# EAGLE board All_Plate_Release (EAGLE 9.3.0)
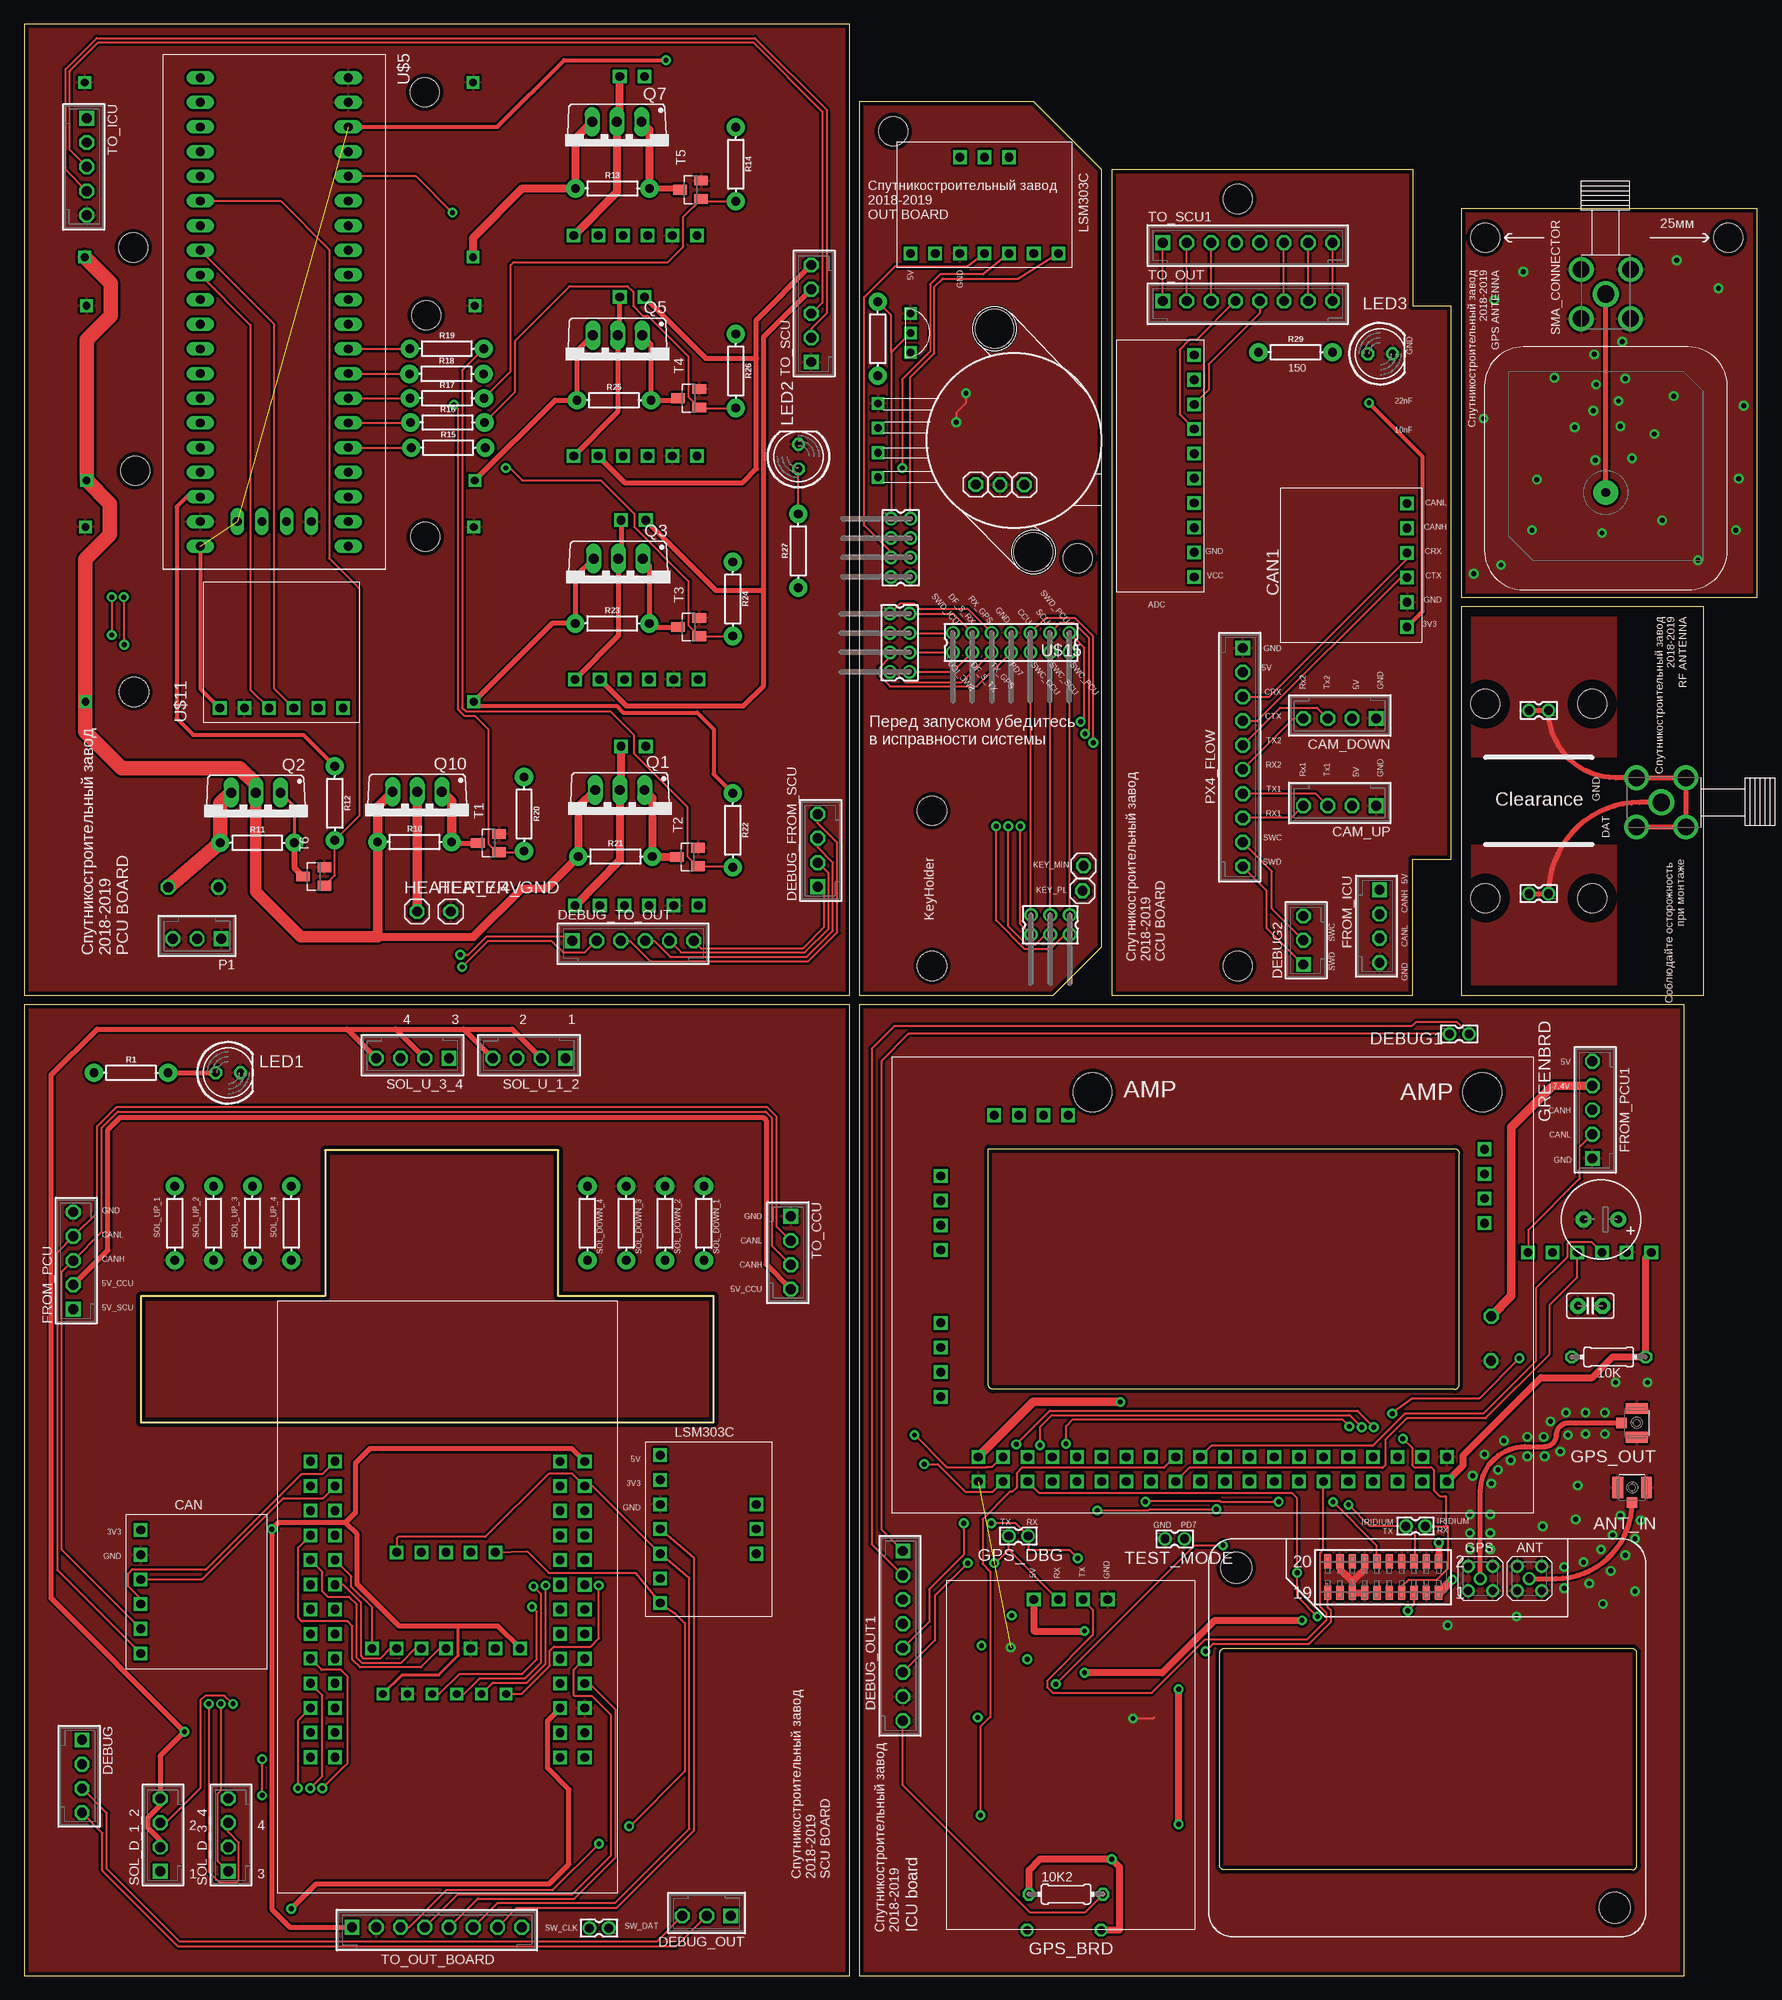
[diagram p0: board, top side]
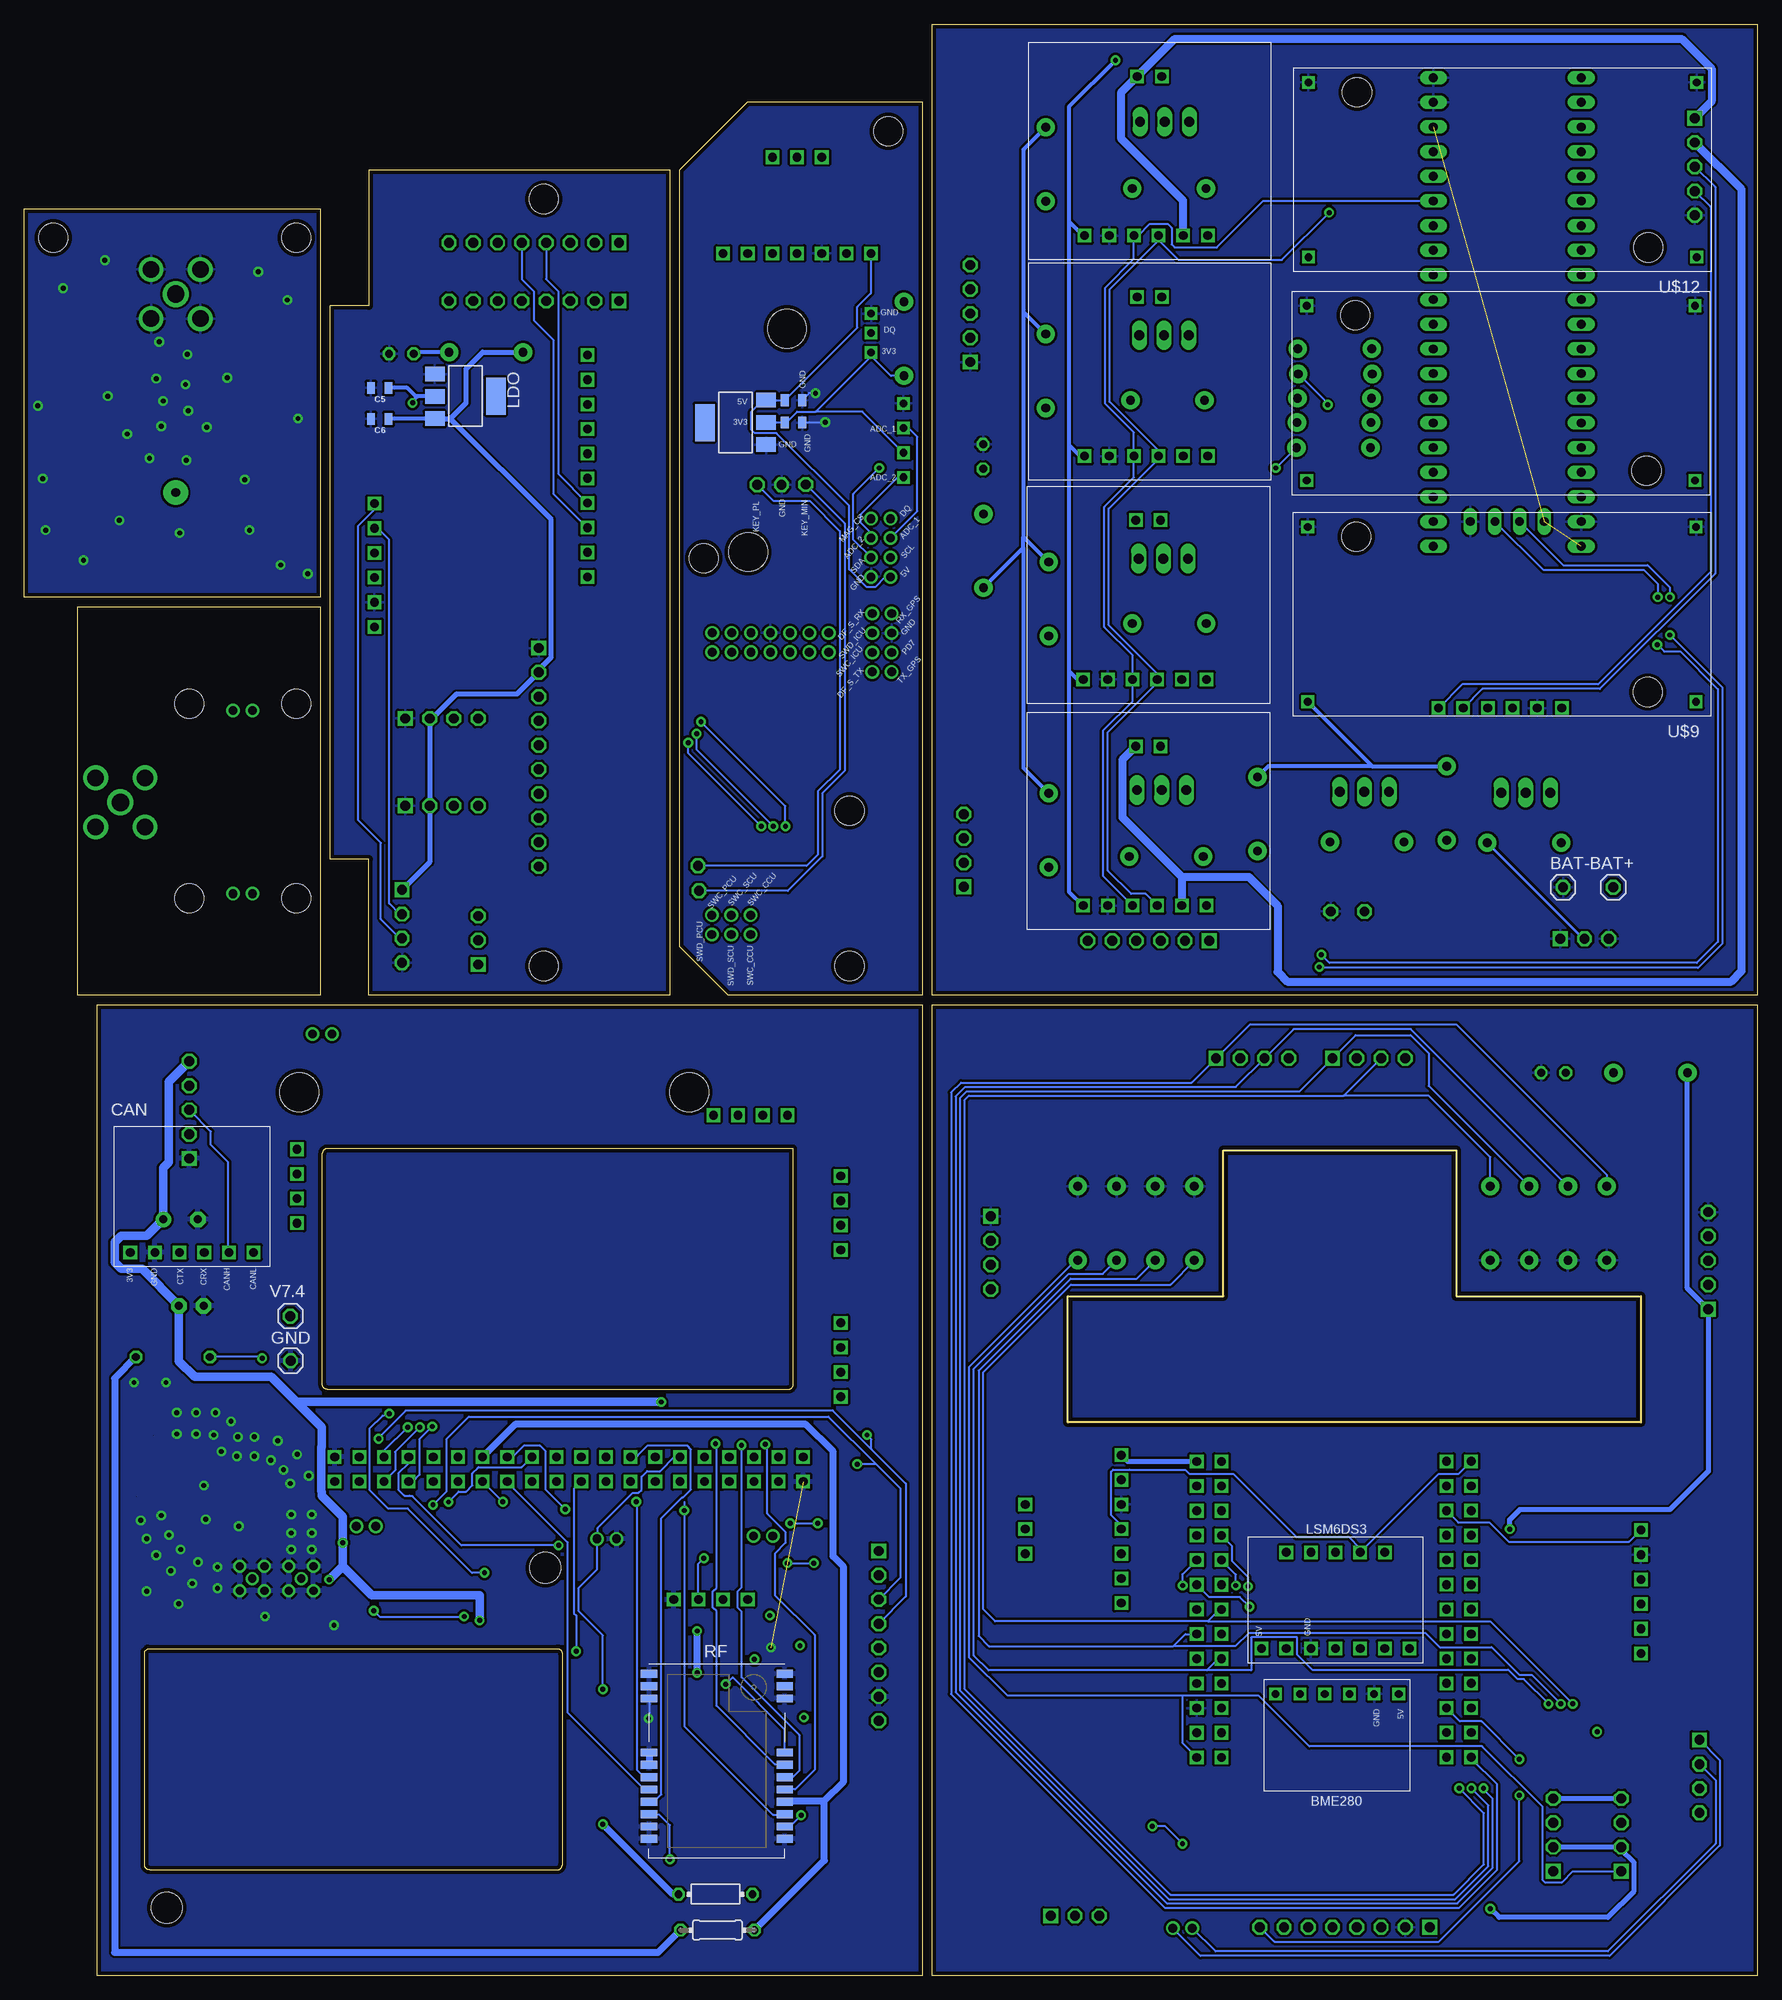
[diagram p1: board, bottom side, seen from below]

Size 178.5 x 201 mm. Coordinates in mm from the lower left corner, seen from the top.
Outline: 0,0 85,0 85,100 0,100 0,0
Outline: 55,85 31,85 31,70 12,70 12,57 71,57 71,70 55,70 55,85
Outline: 86,0 171,0 171,100 86,100 86,0
Outline: 99.3,85.2 147.3,85.2 arc-90 147.8,84.7 147.8,60.9 arc-90 147.3,60.4 99.8,60.4 arc-90 99.3,60.9 99.3,85.2
Outline: 123.1,33.2 123.1,11.4 arc90 123.6,10.9 165.6,10.9 arc90 166.1,11.4 166.1,33.4 165.8,33.7 123.6,33.7 arc90 123.1,33.2
Outline: 0,101 85,101 85,201 0,201 0,101
Outline: 86,193 86,101 106,101 111,106 111,186 104,193 86,193
Outline: 147,115 147,172 143,172 143,186 112,186 112,101 143,101 143,115 147,115
Outline: 148,141 148,101 173,101 173,141 148,141
Outline: 178.5,142 178.5,182 148,182 148,142 178.5,142
Copper layers (1*16): Top 0.035mm / dielectric 1mm / Bottom 0.035mm
Design rules "rezonit": minimum track width 0.2mm, minimum drill 0.5mm, track to track 0.25mm, track to pad 0.25mm, pad to pad 0.25mm, via to via 0.25mm, smd to smd 0.2mm, copper to edge 0.4mm, drill to drill 0.4mm, minimum pad ring 0.25mm, minimum via ring 0.25mm, stop-mask expansion 4mil, vias tented up to drill 0.6mm, thermal gap 10mil
Net classes: 0 default: clearance 0.065 mm; 2 rf: width 0.5 mm, clearance 0.065 mm
Holes 3.2 mm at 124.84,42 163.84,7
Holes 4 mm at 110.02,91.01 150.18,91.01
Holes 3 mm at 89.5,190 108.5,146 93.5,104 93.5,120 125,104 125,183 150.5,131 161.5,131 150.5,111 161.5,111 175.5,179 150.5,179

## Footprints (pad centres in the part's own frame; a part is rotated, then mirrored left to right if it is on the bottom)
0204/7 = drill 0.813 octagon: 1 -3.81,0; 2 3.81,0
MMCX-P-P-X-ST-TH1 = drill 0.84 pad 1.3: 1 0,0; 2 -1.27,1.27; 3 -1.27,-1.27; 4 1.27,1.27; 5 1.27,-1.27
HRS_U.FL-R-SMT(01) = smd 1.1 x 2.25: 1 -1.475,0; 2 1.475,0 | smd 1.05 x 1.1: 3 0,-1.55
1X01 = drill 1.016 octagon: 1 0,0
E3,5-8 = drill 0.813 pad 1.6: + -1.778,0 | drill 0.813 pad 1.6 octagon: - 1.778,0
C2.5-2 = drill 0.813 pad 1.6 octagon: 1 -1.27,0; 2 1.27,0
0805 = smd 0.8 x 1.2: 1 -0.9,0; 2 0.9,0
B4B-EH-A = drill 1.016 square: 1 -3.75,0 | drill 1.016 octagon: 2 -1.25,0; 3 1.25,0; 4 3.75,0
CAN = drill 0.9 square: 3V3 -5.75,6.35; CANH -5.75,-3.81; CANL -5.75,-6.35; CRX -5.75,-1.27; CTX -5.75,1.27; GND -5.75,3.81
332-02 = drill 0.9 pad 1.27: 1 0,-1; 2 0,1
B3B-EH-A = drill 1.016 square: 1 -2.5,0 | drill 1.016 octagon: 2 0,0; 3 2.5,0
B8B-EH-A = drill 1.016 square: 1 -8.75,0 | drill 1.016 octagon: 2 -6.25,0; 3 -3.75,0; 4 -1.25,0; 5 1.25,0; 6 3.75,0; 7 6.25,0; 8 8.75,0
B6B-EH-A = drill 1.016 square: 1 -6.25,0 | drill 1.016 octagon: 2 -3.75,0; 3 -1.25,0; 4 1.25,0; 5 3.75,0; 6 6.25,0
B5B-EH-A = drill 1.016 square: 1 -5,0 | drill 1.016 octagon: 2 -2.5,0; 3 0,0; 4 2.5,0; 5 5,0
GPS = drill 0.9 square: GND -16,3.81; RX -16,-1.27; TX -16,1.27; UCC -16,-3.81
ICU = drill 0.9 square: 3V3_0 20.23,24.13; 3V3_1 8.96,-28; 5V_0 17.69,-24.13; 5V_1 -14,28; 5V_2 -17.5,-19.96; GND -8.92,28; GND_0 20.23,-24.13; GND_1 17.69,24.13; GND_2 -17.5,-22.5; GND_3 11.5,-28; PA1 20.23,21.59; PA2 6.42,-28; PA3 3.88,-28; PA4 -11.24,-28; PA5 -8.7,-28; PA6 -6.16,-28; PA7 -3.62,-28; PA8 20.23,3.81; PB0 20.23,-13.97; PB1 17.69,-13.97; PB2 20.23,-16.51; PB3 17.69,-16.51; PB4 20.23,-19.05; PB5 17.69,-19.05; PB6 20.23,-21.59; PB7 17.69,-21.59; PB12 17.69,16.51; PB13 20.23,16.51; PB14 17.69,19.05; PB15 20.23,19.05; PC1 -17.5,-17.42; PC2 -17.5,-14.88; PC4 17.69,21.59; PC5 20.23,13.97; PC7 17.69,1.27; PC8 20.23,1.27; PC9 17.69,3.81; PD0 20.23,-3.81; PD1 17.69,-1.27; PD4 20.23,-8.89; PD5 17.69,-8.89; PD7 17.69,-11.43; PD8 17.69,11.43; PD9 20.23,11.43; PD10 17.69,13.97; PD11 20.23,-11.43; PD13 17.69,-6.35; PD14 20.23,-6.35; PD15 17.69,-3.81; PE7 20.23,-1.27; PE12 17.69,6.35; PE13 20.23,6.35; PE14 17.69,8.89; PE15 20.23,8.89; SWC -6.38,28; SWD -11.46,28
SOT223 = smd 1.499 x 2.007: 1 -2.261,-3.15; 2 0.025,-3.15; 3 2.311,-3.15 | smd 3.81 x 2.007: 4 0,3.15
TE_221790-1 = drill 1.778: 1 0,0 | drill 1.702: 2 -2.54,2.54; 3 2.54,2.54; 4 -2.54,-2.54; 5 2.54,-2.54
LED5MM = drill 0.813 octagon: A -1.27,0; K 1.27,0
B10B-EH-A = drill 1.016 square: 1 -11.25,0 | drill 1.016 octagon: 2 -8.75,0; 3 -6.25,0; 4 -3.75,0; 5 -1.25,0; 6 1.25,0; 7 3.75,0; 8 6.25,0; 9 8.75,0; 10 11.25,0
TO220BV = drill 1.016 long: D 0,-2.54; G -2.54,-2.54; S 2.54,-2.54
AXIAL-0.3 = drill 0.9 pad 1.88: P$1 -3.81,0; P$2 3.81,0
E22-400M22S = smd 0.813 x 1.676: P$1 -9,-6.97; P$2 -7.73,-6.97; P$3 -6.46,-6.97; P$4 -0.89,-6.97; P$5 0.38,-6.97; P$6 1.65,-6.97; P$7 2.92,-6.97; P$8 4.19,-6.97; P$9 5.46,-6.97; P$10 6.73,-6.97; P$11 8,-6.97; P$12 8,7; P$13 6.73,7; P$14 5.46,7; P$15 4.19,7; P$16 2.92,7; P$17 1.65,7; P$18 0.38,7; P$19 -0.89,7; P$20 -6.46,7; P$21 -7.73,7; P$22 -9,7
SOT23 = smd 1 x 1.4: 1 -0.95,-1.1; 2 0.95,-1.1; 3 0,1.1
SCU = drill 0.9 square: 3.3V 11.59,-11.43; 5VUSB 11.59,11.43; +3.3V -11.59,8.9; GND_1 11.59,13.97; GND_2 14.13,-11.43; GND_3 -14.13,8.9; GNDA 11.59,-13.97; NRST -11.59,-16.5; PA0 14.13,-13.97; PA1 14.13,-8.89; PA2 11.59,-8.89; PA3 14.13,-6.35; PA4 11.59,-3.81; PA5 -14.13,-6.34; PA6 -14.13,-1.26; PA7 -14.13,-11.42; PA8 -14.13,13.98; PA9 -14.13,11.44; PA10 -11.59,6.36; PA11 -11.59,13.98; PA12 -11.59,11.44; PB0 -11.59,-11.42; PB1 -14.13,-16.5; PB5 -14.13,1.28; PB6 -11.59,-1.26; PB7 -11.59,-3.8; PB8 -14.13,-3.8; PB9 -11.59,-6.34; PB10 14.13,-1.27; PB11 11.59,1.27; PB12 11.59,3.81; PB13 14.13,1.27; PB14 14.13,3.81; PB15 11.59,6.35; PC0 -11.59,-8.88; PC1 -14.13,-8.88; PC2 14.13,-16.51; PC3 11.59,-6.35; PC4 14.13,-3.81; PC5 11.59,-1.27; PC6 14.13,6.35; PC7 11.59,8.89; PC8 14.13,8.89; PC9 14.13,11.43; PC10 -14.13,6.36; PC11 -11.59,3.82; PC12 -14.13,3.82; PC13 -14.13,-13.96; PD2 -11.59,1.28; VBAT -11.59,-13.96; VDDA 11.59,-16.51; VIN 14.13,13.97
BME = drill 0.8 square: CSB 4.25,3.81; GND 4.25,-3.81; SCL 4.25,-1.27; SDA 4.25,1.27; SDO 4.25,6.35; VCC 4.25,-6.35
LSM6DS3 = drill 0.9 square: 3V3 -5,5.08; CS -5,-5.08; GND -5,2.54; INT1 4.9,0; INT2 4.9,2.54; OCS 4.9,5.08; SAD -5,-7.62; SCL -5,0; SCX 4.9,-2.54; SDA -5,-2.54; SDX 4.9,-5.08; VIN -5,7.62
LSM303C = drill 0.9 square: 3V3 -5,5.08; 5V -5,7.62; CSA -5,-5.08; CSM -5,-7.62; DRYM 4.9,0; GND -5,2.54; INTA 4.9,2.54; INTM 4.9,-2.54; SCL -5,0; SDA -5,-2.54
BLUEPIL = drill 0.9 long: 3V3_0 -19.05,7.62; 3V3_1 24.13,-7.62; 3V3_2 21.59,-3.81; 5V 19.05,-7.62; A0 13.97,7.62; A1 11.43,7.62; A2 8.89,7.62; A3 6.35,7.62; A4 3.81,7.62; A5 1.27,7.62; A6 -1.27,7.62; A7 -3.81,7.62; A8 -13.97,-7.62; A9 -11.43,-7.62; A10 -8.89,-7.62; A11 -6.35,-7.62; A12 -3.81,-7.62; A15 -1.27,-7.62; B0 -6.35,7.62; B1 -8.89,7.62; B3 1.27,-7.62; B4 3.81,-7.62; B5 6.35,-7.62; B6 8.89,-7.62; B7 11.43,-7.62; B8 13.97,-7.62; B9 16.51,-7.62; B10 -11.43,7.62; B11 -13.97,7.62; B12 -24.13,-7.62; B13 -21.59,-7.62; B14 -19.05,-7.62; B15 -16.51,-7.62; C13 21.59,7.62; C14 19.05,7.62; C15 16.51,7.62; GND0 -24.13,7.62; GND1 -21.59,7.62; GND2 21.59,-7.62; GND3 21.59,3.81; RESET -16.51,7.62; SWCLK 21.59,1.27; SWDIO 21.59,-1.27; VB 24.13,7.62
INA = drill 0.9 square: GND -4.15,-8.7; SCL -1.61,-8.7; SDA 0.93,-8.7; VCC -6.69,-8.7; VIN+_0 6.01,-8.7; VIN+_1 1.27,7.7; VIN-_0 3.47,-8.7; VIN-_1 -1.27,7.7
DCDC = drill 0.8 square: IN+ -20,9; IN- -20,-9; OUT+ 20,9; OUT- 20,-9 | hole 3: -15,8; 15,-8
MPX = drill 0.8 square: GND 14,-3.81; V1 14,-1.27; V2 14,3.81; VCC 14,1.27 | hole 4: -2,11.5; 2,-11.5
TEMP = drill 0.8 square: DQ -0.5,0; GND -0.5,-2; VDD -0.5,2
ADS = drill 0.9 square: A0 -3.5,-3.81; A1 -3.5,-6.35; A2 -3.5,-8.89; A3 -3.5,-11.43; ADDR -3.5,1.27; ALERT -3.5,-1.27; G -3.5,8.89; SCL -3.5,6.35; SDA -3.5,3.81; V -3.5,11.43
BY-IRIDIUM-254 = drill 0.9 pad 2.54: P$1 0,0
SAMTEC-CLP-110-02-X-D = smd 0.74 x 1.47: 1 -5.715,1.613; 2 -5.715,-1.613; 3 -4.445,1.613; 4 -4.445,-1.613; 5 -3.175,1.613; 6 -3.175,-1.613; 7 -1.905,1.613; 8 -1.905,-1.613; 9 -0.635,1.613; 10 -0.635,-1.613; 11 0.635,1.613; 12 0.635,-1.613; 13 1.905,1.613; 14 1.905,-1.613; 15 3.175,1.613; 16 3.175,-1.613; 17 4.445,1.613; 18 4.445,-1.613; 19 5.715,1.613; 20 5.715,-1.613
332-14 = drill 0.9 pad 1.27: 1 -6,-1; 2 -6,1; 3 -4,-1; 4 -4,1; 5 -2,-1; 6 -2,1; 7 0,-1; 8 0,1; 9 2,-1; 10 2,1; 11 4,-1; 12 4,1; 13 6,-1; 14 6,1
332-08 = drill 0.9 pad 1.27: 1 -3,-1; 2 -3,1; 3 -1,-1; 4 -1,1; 5 1,-1; 6 1,1; 7 3,-1; 8 3,1
332-06 = drill 0.9 pad 1.27: 1 -2,-1; 2 -2,1; 3 0,-1; 4 0,1; 5 2,-1; 6 2,1

## Placement (x,y rotation side)
10K  10K  [0204/7]  163.19,63.73 180 top
10K1  10K  [0204/7]  107.1,4.7 0 bottom
10K2  10K  [0204/7]  107.3,8.4 0 top
ANT1  MMCX-P-P-X-ST-TH1  [MMCX-P-P-X-ST-TH1]  155.03,40.91 0 top
ANT_IN  U.FL-R-SMT(01)  [HRS_U.FL-R-SMT(01)]  165.6,50.28 0 top
BAT+  [1X01]  14.83,112.12 0 bottom
BAT-  [1X01]  20.01,112.12 0 bottom
C1  [E3,5-8]  162.4,77.9 180 top
C2  [C2.5-2]  161.3,69 0 top
C3  22uF  [0805]  99.27,159.97 0 bottom
C4  10uF  [0805]  99.28,162.27 0 bottom
C5  22uF  [0805]  141.89,163.54 180 bottom
C6  10uF  [0805]  141.89,160.35 180 bottom
CAM_DOWN  B4B-EH-A  [B4B-EH-A]  135.5,129.5 180 top
CAM_UP  B4B-EH-A  [B4B-EH-A]  135.5,120.5 180 top
CAN  CAN  [CAN]  161.23,80.25 90 bottom
CAN1  CAN  [CAN]  136.68,145.28 180 top
DEBUG  B4B-EH-A  [B4B-EH-A]  5.95,20.54 270 top
DEBUG1  332-02  [332-02]  147.8,97 270 top
DEBUG2  B3B-EH-A  [B3B-EH-A]  131.75,106.65 90 top
DEBUG_FROM_SCU  B4B-EH-A  [B4B-EH-A]  81.73,115.9 90 top
DEBUG_OUT  B3B-EH-A  [B3B-EH-A]  70.28,6.16 180 top
DEBUG_OUT1  B8B-EH-A  [B8B-EH-A]  90.5,35 270 top
DEBUG_TO_OUT  B6B-EH-A  [B6B-EH-A]  62.7,106.6 0 top
FROM_ICU  B4B-EH-A  [B4B-EH-A]  139.59,108.1 270 top
FROM_PCU  B5B-EH-A  [B5B-EH-A]  5.05,73.66 90 top
FROM_PCU1  B5B-EH-A  [B5B-EH-A]  161.52,89.18 90 top
GND  [1X01]  151.07,63.34 0 bottom
GPS1  MMCX-P-P-X-ST-TH1  [MMCX-P-P-X-ST-TH1]  149.98,40.91 0 top
GPS_BRD  GPS  [GPS]  107.79,22.75 270 top
GPS_DBG  332-02  [332-02]  102.4,45.3 270 top
GPS_OUT  U.FL-R-SMT(01)  [HRS_U.FL-R-SMT(01)]  166.08,56.94 270 top
GREENBRD  ICU  [ICU]  122.4,71.13 270 top
HEATER_7.4V  [1X01]  40.46,109.62 0 top
HEATER_GND  [1X01]  43.93,109.62 0 top
IC1  REG1117  [SOT223]  105.25,159.97 90 bottom
IRIDIUM  332-02  [332-02]  143.3,46.3 90 top
J1  221790-1  [TE_221790-1]  168.6,120.85 0 top
JP1  [1X01]  109,111.74 270 top
JP2  [1X01]  109.1,114.32 270 top
JP6  [1X01]  98,153.6 270 top
JP7  [1X01]  100.5,153.58 270 top
JP8  [1X01]  103,153.56 270 top
LDO  REG1117  [SOT223]  133.07,162.7 270 bottom
LED1  [LED5MM]  21,93 0 top
LED2  [LED5MM]  79.74,156.47 90 top
LED3  [LED5MM]  139.66,167.07 0 top
P1  B3B-EH-A  [B3B-EH-A]  17.8,106.8 180 top
PX4_FLOW  B10B-EH-A  [B10B-EH-A]  125.5,125.5 270 top
Q1  IRF9530  [TO220BV]  61.35,119.59 180 top
Q2  IRF9530  [TO220BV]  23.85,119.32 180 top
Q3  IRF9530  [TO220BV]  61.18,143.42 180 top
Q5  IRF9530  [TO220BV]  61.11,166.42 180 top
Q7  IRF9530  [TO220BV]  61.04,188.42 180 top
Q10  IRF9530  [TO220BV]  40.47,119.42 180 top
R1  150  [AXIAL-0.3]  11,93 0 top
R2  150  [AXIAL-0.3]  27.5,77.5 90 top
R3  150  [AXIAL-0.3]  23.5,77.5 90 top
R4  150  [AXIAL-0.3]  19.5,77.5 270 top
R5  150  [AXIAL-0.3]  15.5,77.5 90 top
R6  150  [AXIAL-0.3]  58,77.5 270 top
R7  150  [AXIAL-0.3]  62,77.5 90 top
R8  150  [AXIAL-0.3]  66,77.5 90 top
R9  150  [AXIAL-0.3]  70,77.5 270 top
R10  10k  [AXIAL-0.3]  40.2,116.78 0 top
R11  10k  [AXIAL-0.3]  24,116.69 0 top
R12  10k  [AXIAL-0.3]  31.99,120.76 270 top
R13  10k  [AXIAL-0.3]  60.58,184.09 0 top
R14  10k  [AXIAL-0.3]  73.29,186.58 270 top
R15  10  [AXIAL-0.3]  43.66,157.39 0 top
R16  10  [AXIAL-0.3]  43.6,159.99 0 top
R17  10  [AXIAL-0.3]  43.54,162.49 0 top
R18  10  [AXIAL-0.3]  43.48,164.99 0 top
R19  10  [AXIAL-0.3]  43.52,167.59 0 top
R20  10k  [AXIAL-0.3]  51.48,119.66 270 top
R21  10k  [AXIAL-0.3]  60.88,115.28 0 top
R22  10k  [AXIAL-0.3]  72.98,117.98 270 top
R23  10k  [AXIAL-0.3]  60.56,139.28 0 top
R24  10k  [AXIAL-0.3]  72.98,141.8 270 top
R25  10k  [AXIAL-0.3]  60.74,162.28 0 top
R26  10k  [AXIAL-0.3]  73.29,165.28 270 top
R27  150  [AXIAL-0.3]  79.71,146.76 90 top
R28  4k7  [AXIAL-0.3]  87.9,168.6 90 top
R29  150  [AXIAL-0.3]  130.93,167.22 0 top
RF  E22-400M22S  [E22-400M22S]  107.18,22.1 270 bottom
SMA_CONNECTOR  221790-1  [TE_221790-1]  162.9,173.21 90 top
SOL_D_1_2  B4B-EH-A  [B4B-EH-A]  14,14.5 90 top
SOL_D_3_4  B4B-EH-A  [B4B-EH-A]  21,14.5 90 top
SOL_U_1_2  B4B-EH-A  [B4B-EH-A]  52,94.5 180 top
SOL_U_3_4  B4B-EH-A  [B4B-EH-A]  40,94.5 180 top
T1  2N7002E  [SOT23]  47.81,116.66 90 top
T2  2N7002E  [SOT23]  68.31,115.23 90 top
T3  2N7002E  [SOT23]  68.42,138.91 90 top
T4  2N7002E  [SOT23]  68.42,162.48 90 top
T5  2N7002E  [SOT23]  68.62,183.95 90 top
T6  2N7002E  [SOT23]  29.82,113.22 90 top
TEST_MODE  332-02  [332-02]  118.5,45 270 top
TO_CCU  B4B-EH-A  [B4B-EH-A]  78.95,74.47 270 top
TO_ICU  B5B-EH-A  [B5B-EH-A]  6.43,186.32 270 top
TO_OUT  B8B-EH-A  [B8B-EH-A]  126,172.5 0 top
TO_OUT_BOARD  B8B-EH-A  [B8B-EH-A]  42.5,5 0 top
TO_SCU  B5B-EH-A  [B5B-EH-A]  81.07,171.21 90 top
TO_SCU1  B8B-EH-A  [B8B-EH-A]  126,178.5 0 top
U$1  SCU  [SCU]  43.6,39 0 top
U$2  BME  [BME]  43.28,24.77 90 bottom
U$3  LSM6DS3  [LSM6DS3]  43.44,38.71 90 bottom
U$4  LSM303C  [LSM303C]  70.5,46 0 top
U$5  BLUEPILLTHEONLYONE  [BLUEPIL]  25.75,171.37 270 top
U$6  INA  [INA]  62.6,187.93 0 bottom
U$7  CAN  [CAN]  17.74,39.55 0 top
U$8  INA  [INA]  62.74,118.93 0 bottom
U$9  DCDC  [DCDC]  26.3,140.22 180 bottom
U$10  DCDC  [DCDC]  26.41,163.01 180 bottom
U$11  CAN  [CAN]  26.48,136.32 90 top
U$12  DCDC  [DCDC]  26.23,186.01 180 bottom
U$13  INA  [INA]  62.6,165.22 0 bottom
U$14  INA  [INA]  62.74,142.22 0 bottom
U$15  MPX  [MPX]  101.94,158.14 180 top
U$16  TEMP  [TEMP]  90.78,169.2 180 top
U$17  LSM303C  [LSM303C]  98.9,182.4 90 top
U$18  ADS  [ADS]  117,155.5 180 top
U$19  BY-IRIDIUM-254  [BY-IRIDIUM-254]  162.9,152.76 180 top
USER_PORT1  SAMTEC-CLP-110-02-X-DJ  [SAMTEC-CLP-110-02-X-D]  139.96,41.05 180 top
V7.4  [1X01]  151.09,67.94 0 bottom
X1  332-02  [332-02]  59.2,4.9 90 top
X2  332-14  [332-14]  101.64,137.32 0 top
X3  332-08  [332-08]  90.28,147.08 270 top
X4  332-08  [332-08]  90.16,137.3 270 top
X5  332-06  [332-06]  105.68,108.24 0 top
X6  332-02  [332-02]  155.99,111.45 90 top
X7  332-02  [332-02]  155.99,130.33 90 top

## Library data of the parts
10K 10K1 10K2 = rcl; SPICEPREFIX: R
ANT1 GPS1 = MMCX-P-P-X-ST-TH1; DESCRIPTION: Conn MMCX PL 0Hz to 6GHz 50Ohm Solder ST Thru-Hole Gold Over Nickel; DIGI-KEY_PART_NUMBER: SAM10618-ND; DIGI-KEY_PURCHASE_URL: https://www.digikey.ru/product-detail/en/samtec-inc/MMCX-P-P-H-ST-TH1/SAM10618-ND/6561612?utm_source=snapeda&utm_medium=aggregator&utm_campaign=symbol; MF: Samtec Inc.; MP: MMCX-P-P-H-ST-TH1; PACKAGE: None
ANT_IN GPS_OUT = U.FL-R-SMT_01_; DESCRIPTION: U.FL Series 6 Ghz 50 Ohm Ultra-small SMT Coaxial Cable Receptacle; DIGI-KEY_PART_NUMBER: H9161-ND; DIGI-KEY_PURCHASE_URL: https://www.digikey.ru/product-detail/en/hirose-electric-co-ltd/U.FL-R-SMT_01_/H9161-ND/513010?utm_source=snapeda&utm_medium=aggregator&utm_campaign=symbol; MF: Hirose; MP: U.FL-R-SMT_01_; PACKAGE: None
BAT+ BAT- GND HEATER_7.4V HEATER_GND JP1 JP2 JP6-JP8 V7.4 = pinhead
C1 = rcl; SPICEPREFIX: C
C2 = capacitor-wima
C3 C5 = SparkFun-Capacitors; PROD_ID: CAP-08402
C4 C6 = SparkFun-Capacitors; PROD_ID: CAP-14260
CAM_DOWN CAM_UP DEBUG DEBUG2 DEBUG_FROM_SCU DEBUG_OUT DEBUG_OUT1 DEBUG_TO_OUT FROM_ICU FROM_PCU FROM_PCU1 P1 PX4_FLOW SOL_D_1_2 SOL_D_3_4 SOL_U_1_2 SOL_U_3_4 TO_CCU TO_ICU TO_OUT TO_OUT_BOARD TO_SCU TO_SCU1 = con-jst-eh
CAN CAN1 GPS_BRD GREENBRD U$1-U$18 = bluepill
DEBUG1 GPS_DBG IRIDIUM TEST_MODE X1-X7 = con-garry
IC1 LDO = burr-brown; MPN: REG1117; OC_FARNELL: 1097566; OC_NEWARK: 14P6981
J1 SMA_CONNECTOR = 221790-1; AVAILABILITY: Unavailable; COMMENT: 221790-1; DESCRIPTION: JACK,RIGHT ANGLE,PCB,SMA; EU_ROHS_COMPLIANCE: Compliant with Exemptions; MF: TE Connectivity; MP: 221790-1; NUMBER_OF_POSITIONS: 1; PACKAGE: None; PRICE: None; TE_PURCHASE_URL: https://www.te.com/usa-en/product-221790-1.html?te_bu=Cor&te_type=disp&te_campaign=seda_glo_cor-seda-global-disp-prtnr-fy19-seda-model-bom-cta_sma-317_1&elqCampaignId=32493
LED1-LED3 = led
Q1-Q3 Q5 Q7 Q10 = transistor-power
R1-R29 = SparkFun-Resistors
RF = ebyte-radio
T1-T6 = nxp_60
U$19 = iridium-antenna
USER_PORT1 = SAMTEC-CLP-110-02-X-D; DESCRIPTION: .050 Tiger Claw™ Rugged Reliable Dual Wipe Socket Strip; DIGI-KEY_PART_NUMBER: CLP-110-02-L-D-K-ND; DIGI-KEY_PURCHASE_URL: https://www.digikey.ru/product-detail/en/samtec-inc/CLP-110-02-L-D-K/CLP-110-02-L-D-K-ND/6693709?utm_source=snapeda&utm_medium=aggregator&utm_campaign=symbol; MF: Samtec Inc.; MP: CLP-110-02-L-D-K; PACKAGE: None

## Nets
3.3V: 10K1.1 10K2.1 10K.1 CAN.3V3 GREENBRD.3V3_0 RF.P$9
3V1: U$5.3V3_0 U$5.3V3_1 U$5.3V3_2 U$6.VCC U$8.VCC U$11.3V3 U$13.VCC U$14.VCC
3V2: C3.1 IC1.2 R28.P$1 U$15.VCC U$16.VDD
3V3: SOL_D_1_2.2 SOL_D_1_2.4 SOL_D_3_4.2 SOL_D_3_4.4 SOL_U_1_2.2 SOL_U_1_2.4 SOL_U_3_4.2 SOL_U_3_4.4 U$1.3.3V
3V4: C5.1 CAN1.3V3 LDO.2
5V: C4.1 IC1.3 U$17.5V X3.7
5V_CCU: FROM_PCU.2 TO_CCU.4
5V_CCU1: TO_SCU.4 U$14.VIN-_0 U$14.VIN-_1
5V_CCU2: C6.1 CAM_DOWN.2 CAM_UP.2 FROM_ICU.1 LDO.3 PX4_FLOW.2 R29.P$1
5V_CONTINUOUS: Q3.S R12.P$1 R14.P$1 R20.P$1 R22.P$1 R23.P$1 R24.P$1 R26.P$1 R27.P$1 U$5.5V U$9.OUT+
5V_ICU: C1.+ C2.2 FROM_PCU1.5 GPS_BRD.UCC GREENBRD.5V_0 USER_PORT1.1 USER_PORT1.2
5V_ICU1: TO_ICU.1 U$6.VIN-_0 U$6.VIN-_1
5V_SCU: FROM_PCU.1 R1.P$1 TO_OUT_BOARD.1 U$1.VIN U$2.VCC U$3.VIN U$4.5V
5V_SCU1: TO_SCU.5 U$13.VIN-_0 U$13.VIN-_1
7.4V: FROM_PCU1.4 V7.4.1
7.4V1: TO_ICU.2 U$8.VIN-_0 U$8.VIN-_1
ADC_1: U$15.V1 X3.3
ADC_2: U$15.V2 X3.4
ADC_OUT_1: TO_OUT_BOARD.5 U$1.PA1
ADC_OUT_2: TO_OUT_BOARD.4 U$1.PA3
CANH: TO_ICU.3 TO_SCU.3 U$11.CANH
CANL: TO_ICU.4 TO_SCU.2 U$11.CANL
CRX: CAN1.CRX PX4_FLOW.3
CTX: CAN1.CTX PX4_FLOW.4
DAT: J1.1 X6.1 X6.2
DF_CTS: USER_PORT1.11
DF_DCD: USER_PORT1.9
DF_DSR: USER_PORT1.10
DF_RI: GREENBRD.PC9 USER_PORT1.12
DF_S_RX: DEBUG_OUT1.4 GREENBRD.PB7 IRIDIUM.1 USER_PORT1.7
DF_S_RX1: X2.4 X4.2
DF_S_TX: DEBUG_OUT1.3 GREENBRD.PB6 IRIDIUM.2 USER_PORT1.6
DF_S_TX1: X2.3 X4.8
DQ: R28.P$2 U$16.DQ X3.1
DQ_TEMP: TO_OUT_BOARD.8 U$1.PB0
GND: FROM_PCU.5 LED1.K R2.P$1 R3.P$1 R4.P$2 R5.P$1 R6.P$1 R7.P$2 R8.P$2 R9.P$1 TO_CCU.1 TO_OUT_BOARD.2 U$1.GND_2 U$2.GND U$3.GND U$4.GND U$7.GND
GND1: ANT1.2 ANT1.3 ANT1.4 ANT1.5 ANT_IN.1 ANT_IN.2 C1.- C2.1 CAN.GND DEBUG_OUT1.7 FROM_PCU1.1 GND.1 GPS1.2 GPS1.3 GPS1.4 GPS1.5 GPS_BRD.GND GPS_OUT.1 GPS_OUT.2 GREENBRD.GND_0 GREENBRD.GND_1 RF.P$1 RF.P$2 RF.P$3 RF.P$4 RF.P$5 RF.P$10 RF.P$11 RF.P$12 RF.P$20 RF.P$22 TEST_MODE.1 USER_PORT1.3 USER_PORT1.4 USER_PORT1.8 USER_PORT1.13 USER_PORT1.14 USER_PORT1.15 USER_PORT1.18
GND2: BAT-.1 HEATER_GND.1 LED2.K P1.1 P1.3 T1.2 T2.2 T3.2 T4.2 T5.2 T6.2 TO_ICU.5 TO_SCU.1 U$5.GND0 U$5.GND1 U$5.GND2 U$5.GND3 U$6.GND U$8.GND U$9.IN- U$9.OUT- U$10.IN- U$10.OUT- U$11.GND U$12.IN- U$12.OUT- U$13.GND U$14.GND
GND3: C3.2 C4.2 IC1.1 JP7.1 U$15.GND U$16.GND U$17.GND X2.8 X3.8 X4.3
GND4: C5.2 C6.2 CAM_DOWN.1 CAM_UP.1 CAN1.GND FROM_ICU.4 LDO.1 LED3.K PX4_FLOW.1
GND5: J1.2 J1.3 J1.4 J1.5 X7.1 X7.2
GND6: SMA_CONNECTOR.2 SMA_CONNECTOR.3 SMA_CONNECTOR.4 SMA_CONNECTOR.5
HEATER_7.4V: HEATER_7.4V.1 Q10.D
KEY_1: BAT+.1 Q2.S R11.P$1
KEY_2: Q1.S Q2.D Q10.S R10.P$1 R21.P$1 U$9.IN+ U$10.IN+ U$12.IN+
KEY_MINUS: JP1.1 JP6.1
KEY_PLUS: JP2.1 JP8.1
KILLSWITCH: R12.P$2 T6.1 U$5.A9
MAG_CS: TO_OUT_BOARD.3 U$3.OCS U$4.CSM
MAG_CS1: U$17.CSM X3.2
MISO_2: U$1.PB14 U$2.SDO
MISO_3: U$1.PC11 U$3.SAD
MOSI_2: U$1.PB15 U$2.SDA
MOSI_3: U$1.PC12 U$3.SDA
N$1: GREENBRD.PB14 RF.P$16
N$2: GREENBRD.PB12 RF.P$19
N$3: GREENBRD.PE15 RF.P$6
N$4 [rf]: ANT1.1 ANT_IN.3
N$5 [rf]: GPS1.1 GPS_OUT.3
N$6: U$1.PA11 U$7.CRX
N$7: U$1.PA12 U$7.CTX
N$8: GREENBRD.PB13 RF.P$18
N$9: CAN.CANL FROM_PCU1.2
N$10: CAN.CTX GREENBRD.PD1
N$11: CAN.CANH FROM_PCU1.3
N$12: GREENBRD.PD15 RF.P$13
N$13: GREENBRD.PD13 RF.P$8
N$14: CAN.CRX GREENBRD.PD0
N$15: GREENBRD.PB15 RF.P$17
N$16: U$1.+3.3V U$7.3V3
N$17: GREENBRD.PE12 RF.P$14
N$18: 10K1.2 GREENBRD.PE14 RF.P$15
N$19: LED1.A R1.P$2
N$23: FROM_PCU.3 TO_CCU.3 U$7.CANH
N$25: FROM_PCU.4 TO_CCU.2 U$7.CANL
N$26: DEBUG.3 DEBUG_OUT.3
N$27: DEBUG.4 DEBUG_OUT.2
N$28: GREENBRD.PE13 RF.P$7
N$29: Q1.G R21.P$2 T2.3
N$30: Q3.G R23.P$2 T3.3
N$31: Q5.G R25.P$2 T4.3
N$32: Q5.S R25.P$1 U$10.OUT+
N$33: Q7.G R13.P$2 T5.3
N$34: Q7.S R13.P$1 U$12.OUT+
N$35: Q3.D U$14.VIN+_0 U$14.VIN+_1
N$36: Q5.D U$13.VIN+_0 U$13.VIN+_1
N$37: Q7.D U$6.VIN+_0 U$6.VIN+_1
N$38: Q1.D U$8.VIN+_0 U$8.VIN+_1
N$39: U$5.B10 U$6.SCL U$8.SCL U$13.SCL U$14.SCL
N$40: U$5.B11 U$6.SDA U$8.SDA U$13.SDA U$14.SDA
N$41: U$5.A12 U$11.CTX
N$42: U$5.A11 U$11.CRX
N$43: LED2.A R27.P$2
N$44: Q10.G R10.P$2 T1.3
N$45: R15.P$1 U$5.A0
N$46: R16.P$1 U$5.A1
N$47: R17.P$1 U$5.A2
N$48: R18.P$1 U$5.A3
N$49: R19.P$1 U$5.A4
N$50: P1.2 Q2.G R11.P$2 T6.3
N$51: CAN1.CANL FROM_ICU.3
N$52: CAN1.CANH FROM_ICU.2
N$53: LED3.A R29.P$2
N$54: TO_OUT.8 TO_SCU1.8
N$55: TO_OUT.7 TO_SCU1.7
N$56: TO_OUT.6 TO_SCU1.6
N$57: TO_OUT.3 TO_SCU1.3
N$58: TO_OUT.2 TO_SCU1.2
N$59: TO_OUT.1 TO_SCU1.1
N$60: TO_SCU1.5 U$18.SCL
N$61: TO_SCU1.4 U$18.SDA
N$62: TO_OUT.5 U$18.A1
N$63: TO_OUT.4 U$18.A0
N$64: SMA_CONNECTOR.1 U$19.P$1
NETWORK_AVAILABLE: GREENBRD.PE7 USER_PORT1.19
NSS_2: U$1.PB12 U$2.CSB
NSS_3: U$1.PD2 U$3.CS
ON_OFF: 10K.2 GREENBRD.PB4 USER_PORT1.5
PCTRL_AMP: R19.P$2 R22.P$2 T2.1
PCTRL_CCU: R15.P$2 R24.P$2 T3.1
PCTRL_HEATER: R18.P$2 R20.P$2 T1.1
PCTRL_ICU: R14.P$2 R17.P$2 T5.1
PCTRL_SCU: R16.P$2 R26.P$2 T4.1
PD1: X2.7 X4.5
PD7: 10K2.2 DEBUG_OUT1.8 GREENBRD.PD7 TEST_MODE.2
RESERVED_1: USER_PORT1.16
RESERVED_2\: USER_PORT1.17
RX1: CAM_UP.4 PX4_FLOW.8
RX2: CAM_DOWN.4 PX4_FLOW.6
RX_GPS: DEBUG_OUT1.6 GPS_BRD.RX GPS_DBG.1
RX_GPS1: X2.6 X4.1
SCK_2: U$1.PB13 U$2.SCL
SCK_3: U$1.PC10 U$3.SCL
SCL: U$17.SCL X3.5
SCL3: TO_OUT_BOARD.7 U$1.PA8 U$3.SCX U$4.SCL
SDA: U$17.SDA X3.6
SDA3: TO_OUT_BOARD.6 U$1.PC9 U$3.SDX U$4.SDA
SOL_D_1: R9.P$2 SOL_D_1_2.1 U$1.PC2
SOL_D_2: R8.P$1 SOL_D_1_2.3 U$1.PC3
SOL_D_3: R7.P$1 SOL_D_3_4.1 U$1.PC4
SOL_D_4: R6.P$2 SOL_D_3_4.3 U$1.PC5
SOL_U_1: R5.P$2 SOL_U_1_2.1 U$1.PB1
SOL_U_2: R4.P$1 SOL_U_1_2.3 U$1.PA7
SOL_U_3: R3.P$2 SOL_U_3_4.1 U$1.PC1
SOL_U_4: R2.P$2 SOL_U_3_4.3 U$1.PA5
SUPPLY_OUT: USER_PORT1.20
SW_CLK: DEBUG.2 X1.2
SW_DAT: DEBUG.1 X1.1
SWC: DEBUG1.2 DEBUG_OUT1.2
SWC1: DEBUG2.2 PX4_FLOW.9
SWC_ICU: X2.1 X4.6
SWCLK_0: DEBUG_TO_OUT.1 U$5.SWCLK
SWCLK_2: DEBUG_FROM_SCU.3 DEBUG_TO_OUT.4
SWCLK_3: DEBUG_FROM_SCU.1 DEBUG_TO_OUT.6
SWCLK_CCU: X2.9 X5.2
SWCLK_PCU: X2.13 X5.6
SWCLK_SCU: X2.11 X5.4
SWD: DEBUG1.1 DEBUG_OUT1.1
SWD1: DEBUG2.1 PX4_FLOW.10
SWD_ICU: X2.2 X4.4
SWDIO_0: DEBUG_TO_OUT.2 U$5.SWDIO
SWDIO_2: DEBUG_FROM_SCU.4 DEBUG_TO_OUT.3
SWDIO_3: DEBUG_FROM_SCU.2 DEBUG_TO_OUT.5
SWDIO_CCU: X2.10 X5.1
SWDIO_PCU: X2.14 X5.5
SWDIO_SCU: X2.12 X5.3
TX1: CAM_UP.3 PX4_FLOW.7
TX2: CAM_DOWN.3 PX4_FLOW.5
TX_GPS: DEBUG_OUT1.5 GPS_BRD.TX GPS_DBG.2 GREENBRD.PD9
TX_GPS1: X2.5 X4.7

## Tracks (layer width: path | path; a pad name or v marks a point on that pad's centre or on a via)
3.3V  (via drill 0.5)
  Top 0.7: 10K1.1 112.8,4.7 112.8,11.2 v112,12 104.6,12 103.49,10.89 10K2.1 | CAN.3V3 167,73.92 10K.1 163.63,63.73 161.5,61.6 156.2,61.6 148.2,53.6 148.2,52.57 GREENBRD.3V3_0
  Bottom 0.2: v112,12 112,15.5 113.1,16.6 114.1,16.6 RF.P$9
  Bottom 0.7: 10K.1 169.2,61.53 169.2,2.4 113.21,2.4 10K1.1
3V1  (via drill 0.5)  (2 unrouted)
  Top 0.4: U$5.3V3_0 48.72,190.42 55.6,197.3 v66.1,197.3 | U$5.3V3_1 18.13,132.57 U$11.3V3
  Bottom 0.4: v66.1,197.3 70.9,192.5 70.9,180.7 | U$8.VCC 70.9,111.67 70.9,134.4 | 70.9,180.7 70.9,157.7 | 70.9,157.7 70.9,134.4 | U$14.VCC 70.02,133.52 70.9,134.4 | U$13.VCC 69.72,156.52 70.9,157.7 | U$6.VCC 69.43,179.23 70.9,180.7
3V2
  Bottom 0.2: IC1.2 100.19,160 C3.1 100.03,159.97 98.9,161.1 97,161.1 | 97,161.1 91.28,166.82 | 91.28,166.82 U$16.VDD | U$15.VCC 92.17,161.1 97,161.1 | R28.P$1 89.25,164.79 91.28,166.82
3V3  (via drill 0.5)
  Top 0.5: 33.25,97.5 7.5,97.5 2.77,92.78 2.77,38.87 v16.5,25.14 14,22.64 SOL_D_1_2.4 14,17.54 12.74,16.27 12.74,15.23 14,13.96 SOL_D_1_2.2 | 33.25,97.5 38.25,97.5 | 38.25,97.5 45.25,97.5 | 45.25,97.5 50.25,97.5 SOL_U_1_2.2 | SOL_U_3_4.4 33.25,97.5 | SOL_U_3_4.2 38.25,97.5 | SOL_U_1_2.4 45.25,97.5 | v27.5,6.9 30.05,9.45 54.05,9.45 56.1,11.5 56.1,19.2 53.9,21.4 53.9,26.28 U$1.3.3V
  Bottom 0.5: SOL_D_1_2.4 SOL_D_3_4.4 | SOL_D_3_4.2 SOL_D_1_2.2 14,12.98 12.74,11.72 12.74,8.66 15.4,6 26.6,6 v27.5,6.9
3V4  (via drill 0.5)
  Top 0.4: v138.5,162 144,156.5 144,140.5 CAN1.3V3
  Bottom 0.4: LDO.2 138,162.68 | 138,162.68 138.18,162.68 139.04,163.54 C5.1 | 138,162.68 138.5,162.18 v138.5,162
5V
  Bottom 0.2: X3.7 89.8,144.08 90.84,143.03 91.72,143.03 93.55,144.87 93.55,151.41 101.04,158.9 103.25,158.9 103.6,159.25 103.6,161.1 102.42,162.28 IC1.3 100.19,162.28 C4.1 92.7,169.75 92.7,171.9 91.3,173.3 91.28,173.3 U$17.5V
5V_CCU
  Top 0.5: FROM_PCU.2 8.6,74.71 8.6,87.11 9.88,88.4 76.1,88.4 76.4,88.1 76.4,73.27 TO_CCU.4
5V_CCU1
  Top 0.5: U$14.VIN-_0 61.99,130.8 74.06,130.8 76.15,132.89 76.15,142.7 | TO_SCU.4 76.15,168.79 76.15,142.7 | U$14.VIN-_1 71.23,142.7 76.15,142.7
5V_CCU2
  Bottom 0.4: LDO.3 140.95,160.39 C6.1
  Bottom 0.5: 134.61,160.39 124.24,150.01 124.24,135.78 125.5,134.52 PX4_FLOW.2 127.75,132 134,132 136.5,129.5 CAM_DOWN.2 CAM_UP.2 136.75,114.69 FROM_ICU.1 | LDO.3 134.61,160.39 | 134.61,160.39 133,162 133,165.5 131.28,167.22 R29.P$1
5V_CONTINUOUS
  Top 0.4: U$5.5V 16.72,152.32 15.7,151.3 15.7,129.5 17.4,127.8 28.76,127.8 R12.P$1 | U$9.OUT+ 46.72,130.8 61,130.8 61.7,130.1 69.3,130.1 71,128.4 71,123.77 R22.P$1
  Top 0.5: Q3.S 56.75,144.07 R23.P$1 54.36,139.28 U$9.OUT+
  Bottom 0.4: U$9.OUT+ 39.65,124.57 | 39.65,124.57 R12.P$1 | 39.65,124.57 50.38,124.57 R20.P$1 | R14.P$1 75.6,188.08 75.6,171.4 | R22.P$1 75.6,124.41 75.6,147.06 | 75.6,171.4 75.6,148.23 | R24.P$1 75.6,148.23 | R27.P$1 75.6,147.06 | 75.6,147.06 75.6,148.23 | R26.P$1 75.6,171.4
5V_ICU  (via drill 0.5)
  Top 0.2: 145.7,42.7 USER_PORT1.2 | 104,38.7 GPS_BRD.UCC
  Top 0.7: v145.7,44.6 145.7,42.7 | v109.2,35.5 104,35.5 104,38.7 | v131.6,36.6 122.6,36.6 117.2,31.2 v109.2,31.2 | 147,40.7 v147.1,40.8 | 145.74,39.44 USER_PORT1.1
  Top 0.9: v147.1,40.8 145.74,39.44 | v112.9,59.1 103.93,59.1 GREENBRD.5V_0
  Bottom 0.7: v109.2,31.2 v109.2,35.5
  Bottom 0.9: FROM_PCU1.5 163.6,92.1 163.6,83.8 164.18,83.22 C1.+ 165.87,76.2 168.5,76.2 169.18,75.52 169.18,73.48 168.5,72.8 166.37,72.8 C2.2 162.57,63.3 160.95,61.68 153.08,61.68 150.5,59.1 | v131.6,36.6 131.6,39.2 142.7,39.2 145.7,42.2 | 145.7,42.2 v145.7,44.6 145.7,47.28 147.88,49.46 147.88,49.86 147.93,49.91 147.93,54.43 147.88,54.48 147.88,56.48 150.5,59.1 | 145.7,42.2 v147.1,40.8 | 150.5,59.1 v112.9,59.1
5V_ICU1
  Bottom 0.8: U$6.VIN-_0 59.13,182.83 65.5,189.2 65.5,194 U$6.VIN-_1 60,199.5 7.8,199.5 4.7,196.4 4.7,193.05 TO_ICU.1
5V_SCU  (via drill 0.5)
  Top 0.3: U$2.VCC 38.91,31 42.7,31 44.7,33 44.7,35.9 44.8,36
  Top 0.5: U$3.VIN 48.77,36 44.8,36 38.61,36 34.29,40.32 34.29,45.45 33.08,46.66 | 33.08,46.66 26.16,46.66 v25.5,46 25.5,6.85 27.35,5 TO_OUT_BOARD.1 | U$1.VIN 56.4,54.3 35.6,54.3 34.1,52.8 34.1,47.68 33.08,46.66
  Bottom 0.5: R1.P$1 7.19,70.8 FROM_PCU.1 5.05,51.95 9,48 24.49,48 25.5,46.99 v25.5,46 | U$4.5V 64.85,52.97 U$1.VIN
5V_SCU1
  Top 0.5: U$13.VIN-_0 61.85,153.8 74,153.8 75.4,155.2 75.4,166.6 | TO_SCU.5 75.4,170.54 75.4,166.6 | U$13.VIN-_1 70.19,166.6 75.4,166.6
7.4V
  Top 0.9: V7.4.1 153.18,70.03 153.18,87.45 153.21,87.45 157.29,91.53 arc-45 157.65,91.68 FROM_PCU1.4
7.4V1
  Bottom 0.8: U$8.VIN-_1 65.4,125.24 65.4,119.3 59.27,113.17 | 59.27,113.17 U$8.VIN-_0 | 59.27,113.17 52.37,113.17 49.4,110.2 49.4,103.4 48.4,102.4 2.7,102.4 1.6,103.5 1.6,183.99 TO_ICU.2
ADC_1
  Bottom 0.2: U$15.V1 87.41,159.41 86.5,158.5 86.5,150.86 X3.3
ADC_2
  Bottom 0.2: X3.4 91.28,148.59 92.33,149.65 92.33,150.51 88.52,154.33 U$15.V2
ADC_OUT_1
  Top 0.2: TO_OUT_BOARD.5 46.7,7.95 56.65,7.95 60.9,12.2 60.9,27.4 58.19,30.11 U$1.PA1
ADC_OUT_2
  Top 0.2: TO_OUT_BOARD.4 44.65,8.4 56.46,8.4 60.45,12.39 60.45,26.85 58.5,28.8 56.7,28.8 56.6,28.9 56.6,31.52 U$1.PA3
CANH
  Top 0.2: TO_ICU.3 4.7,188.05 4.7,196.2 7.63,199.13 75.07,199.13 82.2,192 82.2,172.34 TO_SCU.3
  Bottom 0.2: TO_ICU.3 4.35,184.24 4.35,144.41 16.21,132.55 28.31,132.55 U$11.CANH
CANL
  Top 0.2: TO_ICU.4 4.25,186 4.25,196.39 7.44,199.58 75.26,199.58 82.65,192.19 82.65,171.22 81.07,169.64 TO_SCU.2
  Bottom 0.2: TO_ICU.4 4.8,182.19 4.8,144.6 16.4,133 30.4,133 U$11.CANL
CRX
  Top 0.2: PX4_FLOW.3 128.25,131.75 142.43,145.93 CAN1.CRX
CTX
  Top 0.2: PX4_FLOW.4 127,129.25 141.76,144.01 CAN1.CTX
DAT
  Top 0.5: J1.1 166.39,120.85 arc90 X6.1 X6.2
  pour Top (isolate 1): 164,101 148,101 148,116.5 164,116.5
DF_RI  (via drill 0.5)
  Top 0.2: USER_PORT1.12 139.3,42.7 139.3,44.3 v134.8,48.8
  Bottom 0.2: v134.8,48.8 133.75,49.85 132.99,49.85 132.34,50.49 132.34,51.74 131.8,52.28 | 131.8,52.28 131.8,52.3 | 131.8,52.28 131.69,52.39 127.26,52.39 GREENBRD.PC9
DF_S_RX  (via drill 0.5)
  Top 0.2: 146.4,46.3 146.4,49.4 145.8,49.4 145.2,50 145.2,52.1 144.91,52.39 143.15,52.39 142.94,52.59 142.94,54.36 v142,55.3 | USER_PORT1.7 141.9,39.5 141.9,40.1 142.6,40.8 145.5,40.8 146.6,41.9 146.6,46.3 146.4,46.3 | IRIDIUM.1 146.4,46.3 | v91.7,55.7 95.01,52.39 99.11,52.39 99.12,52.4 99.7,52.4 100.74,53.44 GREENBRD.PB7
  Bottom 0.2: 91.25,54.25 95.2,58.2 139.23,58.2 142,55.43 v142,55.3 | 91.25,54.25 87.68,50.68 87.68,39.07 DEBUG_OUT1.4 | 91.25,54.25 91.25,55.25 v91.7,55.7
DF_S_RX1
  Top 0.2: X4.2 95.66,140.3 X2.4
DF_S_TX  (via drill 0.5)
  Top 0.2: USER_PORT1.6 143.2,42.7 143.2,45.4 IRIDIUM.2 138.6,46.3 v136.4,48.5 | v92.7,52.7 94.06,52.7 96.91,49.85 99.76,49.85 GREENBRD.PB6
  Bottom 0.2: v136.4,48.5 135,49.9 135,55.3 132.7,57.6 95.67,57.6 90.73,52.66 | 90.73,52.66 88.28,50.21 88.28,40.97 DEBUG_OUT1.3 | 90.73,52.66 92.67,52.66 v92.7,52.7
DF_S_TX1
  Top 0.2: X4.8 95.62,134.3 X2.3
DQ
  Top 0.2: U$16.DQ 89.28,167.2 | 89.28,167.2 X3.1 | 89.28,167.2 89.28,171.03 R28.P$2
DQ_TEMP  (via drill 0.5)
  Top 0.2: v24.5,18.57 v24.5,22.3
  Bottom 0.2: TO_OUT_BOARD.8 49.75,3.5 32.8,3.5 24.5,11.8 v24.5,18.57 | v24.5,22.3 28.4,26.2 30.63,26.2 U$1.PB0
GND
  pour Bottom: 0,100 0,0 85,0 85,100
  pour Top: 0,100 0,0 85,0 85,100
GND1  (via drill 0.5)  (1 unrouted)
  Top 0.2: USER_PORT1.15 | v114.2,26.5 116.3,26.5 116.4,26.6
  Top 0.7: USER_PORT1.15 USER_PORT1.13 | USER_PORT1.18 135.51,41.88 136.78,40.62 | 136.78,40.62 USER_PORT1.15 | USER_PORT1.14 138.06,41.89 136.78,40.62
  Bottom 0.2: RF.P$3 114.15,26.55 v114.2,26.5
  Bottom 0.7: RF.P$4 RF.P$5
  other vias: 153.1,53.1 160.8,58 160.8,55.8 156.5,55.5 156.6,53.5 157.2,57.1 154.8,53.5 150.4,53.7 152.4,55.1 151.1,50.7 149.2,51.5 151.8,52.1 154.8,55.5 158.2,54 166.5,46.9 164.4,47.4 162.8,55.8 158.8,58 159,55.7 162.8,58 167.2,61.1 101.6,33.8 148.9,47.5 151,47.5 151,45.6 148.9,45.6 148.9,43.9 151,43.9 165.9,45 163.6,45.4 164.9,43.3 162.4,43.9 163.4,41.7 160.6,42.6 158.6,42.1 158.6,39.9 161.2,40.4 160,50.5 156.4,46.3 159.8,47 163.9,61.1 153.7,37 162.6,38.3 165.9,39.6 146.6,36.1
  pour Top: 86,100 171,100 171,0 86,0
  pour Bottom: 86,100 171,100 171,0 86,0
GND2
  pour Top: 0,201 85,201 85,101 0,101
  pour Bottom: 0,201 85,201 85,101 0,101
GND3  (via drill 0.5)
  Top 0.2: v97,163 97,162 96,161 v96,160
  Bottom 0.2: v97,163 97.65,163 C4.2 | v96,160 96.03,159.97 C3.2
  pour Top: 86,193 104,193 111,186 111,106 106,101 86,101
  pour Bottom: 86,193 104,193 111,186 111,106 106,101 86,101
GND4
  pour Top: 112,101 143,101 143,115 147,115 147,172 143,172 143,186 112,186
  pour Bottom: 112,101 143,101 143,115 147,115 147,172 143,172 143,186 112,186
GND5
  Top 0.5: J1.4 J1.5 J1.3 J1.2 163.93,123.39 arc-90 X7.1 X7.2
  pour Top (isolate 1): 164,141 148,141 148,125.5 164,125.5
GND6  (via drill 0.5)
  other vias: 149.3,144.4 152.1,145.3 150.3,160.4 155.3,148.9 155.8,154.1 159.7,159.5 157.6,164.6 151.4,172.6 154.4,175.5 161.7,167 161.9,163.9 161.6,161.2 161.8,156.1 162.5,148.6 168.7,149.9 164.4,159.6 164.2,162.2 164.9,164.5 164.6,168.3 165.6,156.3 167.9,158.8 169.9,162.7 170.2,176.7 174.5,173.8 177.1,161.7 176.6,154.2 176.3,148.9 172.4,145.8
  pour Top: 148,182 148,142 178.5,142 178.5,182
  pour Bottom: 148,142 178.5,142 178.5,182 148,182
HEATER_7.4V
  Top 1: Q10.D HEATER_7.4V.1
KEY_1
  Top 1.5: Q2.S 20.19,120.74 R11.P$1 BAT+.1
KEY_2
  Top 0.8: Q1.S 57.07,120.39 R21.P$1 53.82,112.03 51.29,112.03 46.26,107 36.4,107
  Top 1: Q10.S 36.39,120.42 R10.P$1 36.4,107
  Top 1.2: Q2.D 23.85,111.65 28.5,107 36.4,107
  Top 1.5: Q2.D 23.85,122.75 22.22,124.38 10.06,124.38 6.3,128.14 U$9.IN+ 6.3,145.9 8.8,148.4 8.8,151.62 U$10.IN+ 6.41,168.51 8.9,171 8.9,174.34 U$12.IN+
KEY_MINUS
  Bottom 0.2: JP6.1 94,149.6 94,124.1 96.3,121.8 96.3,115.3 99.86,111.74 JP1.1
KEY_PLUS
  Bottom 0.2: JP8.1 101.34,151.9 97.6,151.9 94.5,148.8 94.5,124.24 96.75,121.99 96.75,115.49 97.92,114.32 JP2.1
KILLSWITCH
  Top 0.2: T6.1 31.99,113.34 R12.P$2 34.5,119.46 34.5,142.9 31.4,146 31.4,177.8 26.4,182.8 U$5.A9
MAG_CS  (via drill 0.5)
  Top 0.2: U$3.OCS 51.79,43.71 54,41.5 62.95,41.5 U$4.CSM 67,37.36 68.05,36.31 68.05,21.05 62.4,15.4 v62.3,15.4 | TO_OUT_BOARD.3 39.68,5 43.53,8.85 54.45,8.85 v59.2,13.6
  Bottom 0.2: v59.2,13.6 61,15.4 v62.3,15.4
MAG_CS1
  Top 0.2: X3.2 91.28,164.64 93.75,167.11 93.75,173.94 94.6,174.79 102.34,174.79 U$17.CSM
MISO_2  (via drill 0.5)
  Top 0.2: U$2.SDO 51.22,29.02 54.14,31.94 54.14,33.49 54.55,33.9 58.34,33.9 59.18,34.74 v59.18,40.2
  Bottom 0.2: v59.18,40.2 59.18,41.36 U$1.PB14
MISO_3
  Top 0.2: U$3.SAD 35.82,37.94 33.69,40.07 33.69,41.14 U$1.PC11
MOSI_2  (via drill 0.5)
  Top 0.2: U$2.SDA 45.3,29.02 46.92,30.65 51.58,30.65 53.24,32.31 53.24,39.31 v52.45,40.1
  Bottom 0.2: v52.45,40.1 52.45,41.05 54.1,42.7 54.1,44.26 U$1.PB15
MOSI_3
  Top 0.2: U$3.SDA 40.26,33.71 38.76,32.21 34.79,32.21 34.25,32.75 34.25,38.24 33.49,39 31.3,39 30.7,39.6 30.7,41.59 U$1.PC12
N$1  (via drill 0.5)
  Top 0.2: v102.17,54.73 105.65,58.2 137.3,58.2 v139,56.5
  Bottom 0.2: RF.P$16 100.1,19.2 99.1,19.2 97.1,21.2 97.1,35.1 101.2,39.2 101.2,43.48 100.1,44.58 100.1,45.72 101.96,47.58 101.96,54.52 v102.17,54.73 | v139,56.5 141.45,54.05 GREENBRD.PB14
N$2  (via drill 0.5)
  Top 0.2: v123.46,44.33 120.54,44.33 v106.25,30.04
  Bottom 0.2: RF.P$19 100.2,23 100.2,25.4 105.5,30.7 105.58,30.71 v106.25,30.04 | GREENBRD.PB12 138.91,52.8 139.96,51.74 139.96,50.05 139.35,49.45 138.8,49.45 138.76,49.39 138.54,49.39 133.47,44.33 v123.46,44.33
N$3  (via drill 0.5)
  Top 0.2: v129.2,48.83 123.24,48.83 123.12,48.94 115.59,48.94 v115.47,48.83
  Bottom 0.2: 115.4,49.1 115.4,48.83 | 115.4,48.83 115.4,21.2 114.7,20.5 114.2,20.5 RF.P$6 | v129.2,48.83 131.22,50.85 GREENBRD.PE15 | v115.47,48.83 115.4,48.83
N$4
  Top 0.5: ANT1.1 157.78,40.91 arc90 ANT_IN.3
N$5
  Top 0.5: GPS1.1 149.98,49.88 arc-90 154.6,54.5 156.6,54.5 arc90 157.8,55.7 arc-90 159.04,56.94 GPS_OUT.3
N$6
  Top 0.2: U$7.CRX 11.99,38.81 10.7,40.1 10.7,41.42 11.14,41.87 18.73,41.87 28.56,51.7 30.73,51.7 U$1.PA11
N$7
  Top 0.2: U$7.CTX 18.32,40.82 26.7,49.2 30.77,49.2 U$1.PA12
N$8  (via drill 0.5)
  Top 0.2: v107.3,54.8 107.3,56.6 108,57.3 135.75,57.3 v136.47,56.57
  Bottom 0.2: RF.P$18 100.2,21.8 101.2,21.8 107.2,27.8 107.2,37.53 107.57,37.91 107.57,39.59 107.2,39.97 107.2,54.7 v107.3,54.8 | v136.47,56.57 137.8,55.25 137.8,51.6 138.5,50.9 GREENBRD.PB13
N$9
  Top 0.2: CAN.CANL 154.9,74.5 154.9,76.8 160.23,82.13 160.23,85.39 FROM_PCU1.2
N$10
  Top 0.2: GREENBRD.PD1 122.26,54.57 138.87,54.57 142.2,57.9 150.3,57.9 155.7,63.3 155.7,70.8 158.91,74.01 158.91,75.34 159.12,75.55 161.45,75.55 CAN.CTX
N$11
  Bottom 0.2: CAN.CANH 157.5,74.5 157.5,83.8 159.29,85.59 159.29,86.95 FROM_PCU1.3
N$12  (via drill 0.5)
  Top 0.2: v98.49,16.54 98.49,25.65 99.5,26.66 99.5,41.62 98.71,42.41 98.71,47.02 101.53,49.84 101.75,49.84 102.2,50.29 102.2,51.75 102.76,52.31 117.39,52.31 118.51,53.44 GREENBRD.PD15
  Bottom 0.2: 100.21,15.4 RF.P$13 100.17,15.41 99.61,15.41 v98.49,16.54
N$13
  Bottom 0.2: 114.2,18 RF.P$8 114.12,18 113.56,18 112.89,18.68 112.89,47.14 110.75,49.27 110.64,49.27 109.85,50.06 109.85,54.23 110.19,54.56 114.35,54.56 115.36,53.55 116.04,53.55 GREENBRD.PD13
N$14
  Top 0.2: GREENBRD.PD0 119.99,52.3 139.9,52.3 140.2,52.6 140.2,55.2 142.4,57.4 150.5,57.4 157.1,64 157.1,69.1 159.96,71.96 CAN.CRX
N$15  (via drill 0.5)
  Top 0.2: v104.62,54.63 104.62,56.53 105.84,57.75 136.5,57.75 v137.75,56.5
  Bottom 0.2: RF.P$17 100.1,20.5 99.3,20.5 98.7,21.1 98.7,24.8 104.62,30.72 104.62,37.49 105.03,37.91 105.03,39.59 104.62,40.01 v104.62,54.63 | v137.75,56.5 140.3,53.95 140.3,52.05 GREENBRD.PB15
N$16
  Bottom 0.2: U$1.+3.3V 30.81,46.7 27.6,46.7 25.6,44.7 13.19,44.7 U$7.3V3
N$17  (via drill 0.5)
  Top 0.2: v122.79,48.04 115.92,48.04 115.81,47.92 v110.53,47.92
  Bottom 0.2: RF.P$14 100.22,16.6 101.4,16.6 110.5,25.7 110.5,47.92 | 110.5,48.8 110.5,47.92 | v122.79,48.04 124.81,50.06 124.81,54 125.38,54.56 127.06,54.56 128.07,53.55 128.75,53.55 GREENBRD.PE12 | v110.53,47.92 110.5,47.92
N$18
  Bottom 0.2: RF.P$15
  Bottom 0.7: RF.P$15 100.08,18 96.1,18 | 96.1,18 94.1,20 94.1,42.1 95.2,43.2 95.2,54 98,56.8 127.93,56.8 GREENBRD.PE14 | 96.1,18 96.1,11.89 10K1.2
N$19
  Top 0.5: R1.P$2 LED1.A
N$20  (via drill 0.5)
  other vias: 103.3,32.6
N$21  (via drill 0.5)
  other vias: 98.6,34
N$22  (via drill 0.5)
  other vias: 101.7,37.1
N$23
  Top 0.2: TO_CCU.3 77,75.17 77,88.36 76.36,89 9.64,89 8,87.36 8,76.61 FROM_PCU.3 3.83,72.44 3.83,43.91 U$7.CANH
N$24  (via drill 0.5)
  other vias: 98.2,26.6
N$25
  Top 0.2: TO_CCU.2 77.5,77.17 77.5,88.5 76.5,89.5 9.5,89.5 7.5,87.5 7.5,78.61 FROM_PCU.4 3.38,74.48 3.38,41.81 U$7.CANL
N$26
  Top 0.2: DEBUG_OUT.3 65.12,3.5 16,3.5 8.5,11 8.5,16.74 DEBUG.3
N$27
  Top 0.2: DEBUG_OUT.2 67.12,3 15.86,3 8.05,10.81 8.05,14.69 DEBUG.4
N$28
  Bottom 0.2: 114.2,19.2 RF.P$7 114.24,19.24 114.69,19.24 122.56,27.11 122.56,44.66 128.75,50.85 GREENBRD.PE13
N$29
  Top 0.8: Q1.G 64.69,121.33 R21.P$2 67.16,115.28 T2.3
N$30
  Top 0.5: Q3.G 64.37,145.31 R23.P$2 64.74,138.91 T3.3
N$31
  Top 0.5: Q5.G 64.55,168.06 R25.P$2 67.12,162.28 T4.3
N$32
  Top 0.5: Q5.S 56.93,167.32 R25.P$1 54.68,162.28 U$10.OUT+
N$33
  Top 0.6: R13.P$2 67.38,184.09 T5.3
  Top 0.8: Q7.G 64.39,190.15 R13.P$2
N$34
  Top 0.8: Q7.S 56.77,189.23 R13.P$1 51.31,184.09 46.23,179.01 U$12.OUT+
N$35
  Top 0.5: U$14.VIN+_1 61.47,146.25 Q3.D 61.18,138 U$14.VIN+_0
N$36
  Top 0.5: U$13.VIN+_1 61.33,169.18 Q5.D 61.11,161.07 U$13.VIN+_0
N$37
  Top 0.8: U$6.VIN+_1 61.33,191.25 Q7.D 61.04,183.71 U$6.VIN+_0
N$38
  Top 0.8: U$8.VIN+_1 61.47,122.25 Q1.D 61.35,114.88 U$8.VIN+_0
N$39
  Bottom 0.2: U$8.SCL 67.35,113.23 67.35,128.29 64.35,131.29 U$14.SCL 64.35,136.01 67.25,138.91 67.25,151.29 64.21,154.33 U$13.SCL 64.21,158.97 67.15,161.91 67.15,173.89 64.21,176.83 U$6.SCL 63.77,179.23 62.56,180.43 60.73,180.43 60.33,180.03 60.33,178.34 60.02,178.03 55.67,178.03 50.9,182.8 U$5.B10
N$40  (via drill 0.5)
  Top 0.2: v44.1,181.6 40.36,185.34 U$5.B11
  Bottom 0.2: U$8.SDA 63.01,111.43 64.5,111.43 66.9,113.83 66.9,128.1 61.81,133.19 U$14.SDA 61.81,134.09 61.8,134.1 66.8,139.1 66.8,151.1 61.67,156.23 U$13.SDA 61.67,157.07 66.7,162.1 66.7,173.7 61.67,178.73 U$6.SDA 61.67,178.77 59.63,176.73 48.97,176.73 v44.1,181.6
N$41
  Top 0.2: U$5.A12 23.3,170.01 23.3,132.48 U$11.CTX
N$42
  Top 0.2: U$5.A11 25.7,170.15 25.7,132.62 U$11.CRX
N$43
  Top 0.2: R27.P$2 79.71,155.17 LED2.A
N$44
  Top 0.5: R10.P$2 44.13,116.66 T1.3
  Top 1: Q10.G 44.01,120.96 R10.P$2
N$45
  Top 0.2: U$5.A0 R15.P$1
N$46
  Top 0.2: U$5.A1 39.74,159.94 R16.P$1
N$47
  Top 0.2: U$5.A2 R17.P$1
N$48
  Top 0.2: U$5.A3 39.64,165.02 R18.P$1
N$49
  Top 0.2: U$5.A4 39.68,167.56 R19.P$1
N$50
  Top 0.3: Q2.G 27.81,120.44 R11.P$2
  Top 0.6: R11.P$2 27.81,114.13 T6.3
  Bottom 0.3: R11.P$2 17.92,106.8 P1.2
N$51
  Bottom 0.2: CAN1.CANL 142.5,151.62 142.5,150.95 144.12,149.32 144.12,119.03 141.78,116.67 141.78,108.83 139.8,106.85 FROM_ICU.3
N$52
  Bottom 0.2: CAN1.CANH 142.12,149.09 140.93,147.9 140.93,110.45 139.8,109.33 FROM_ICU.2
N$53
  Bottom 0.4: R29.P$2 138.24,167.22 LED3.A
N$54
  Top 0.2: TO_OUT.8 TO_SCU1.8
N$55
  Top 0.2: TO_OUT.7 TO_SCU1.7
N$56
  Top 0.2: TO_OUT.6 TO_SCU1.6
N$57
  Top 0.2: TO_OUT.3 TO_SCU1.3
N$58
  Top 0.2: TO_OUT.2 TO_SCU1.2
N$59
  Top 0.2: TO_OUT.1 TO_SCU1.1
N$60
  Bottom 0.2: TO_SCU1.5 127.25,174.75 126,173.5 126,170.5 124,168.5 124,152.65 U$18.SCL
N$61
  Bottom 0.2: TO_SCU1.4 124.75,174.75 123.5,173.5 123.5,154.69 U$18.SDA
N$62
  Top 0.2: TO_OUT.5 127.25,171.25 122,166 122,163.35 U$18.A1
N$63
  Top 0.2: TO_OUT.4 120.75,168.5 120,168.5 119,167.5 119,160.81 U$18.A0
N$64
  Top 0.5: U$19.P$1 SMA_CONNECTOR.1
NETWORK_AVAILABLE  (via drill 0.5)
  Top 0.2: 134.2,40.4 134.2,39.5 USER_PORT1.19 134.26,39.38 134.26,37.91 134.6,37.58 134.6,36.45 132.35,34.2 122.45,34.2 v121.66,33.41
  Bottom 0.2: v121.66,33.41 121.66,37.12 121.89,37.35 121.89,50.17 121.21,50.85 GREENBRD.PE7
NSS_2  (via drill 0.5)
  Top 0.2: U$2.CSB 48.27,30.2 51.76,30.2 53.69,32.13 v53.69,40.19 v53.7,40.2
  Bottom 0.2: v53.7,40.2 53.7,41.32 U$1.PB12
NSS_3
  Top 0.2: U$3.CS 37.72,33.71 36.66,32.66 34.98,32.66 34.7,32.94 34.7,38.42 32.84,40.28 U$1.PD2
ON_OFF  (via drill 0.5)
  Top 0.2: USER_PORT1.5 143.13,38.23 v142.5,37.6 | v133.2,37 131.1,39.1 v131.1,41.5 131.1,49.2 130.6,49.7 104.55,49.7 GREENBRD.PB4 | v140.9,57.9 140.8,57.9 143,59.5 149.9,59.5 v154,63.6
  Bottom 0.2: v142.5,37.6 141.9,37 v133.2,37 | v131.1,41.5 132.4,41.5 139,48.1 141,48.1 142.9,50 142.9,56.4 141.6,57.7 v140.9,57.9 | 10K.2 159.33,63.78 154.18,63.78 v154,63.6
PCTRL_AMP
  Top 0.2: R22.P$2 72.87,114.28 T2.1 69.32,114.28 68.3,115.3 68.3,120.4 62.8,125.9 62.8,127.8 60.38,130.22 45.51,130.22 45.1,130.62 45.1,165.36 R19.P$2
PCTRL_CCU  (via drill 0.5)
  Top 0.2: R24.P$2 72.95,137.96 T3.1 68.4,139.08 68.4,143.63 62.81,149.22 62.81,150.59 59.38,154.02 51.27,154.02 49.99,155.3 v49.6,155.3
  Bottom 0.2: R15.P$2 49.56,155.3 v49.6,155.3
PCTRL_HEATER  (via drill 0.5)
  Top 0.2: R20.P$2 51.34,115.71 T1.1 48.69,115.71 47.8,116.6 47.8,128.37 46.4,129.77 45.32,129.77 44.65,130.44 44.65,161.4 v44.25,161.8
  Bottom 0.2: R18.P$2 44.25,161.95 v44.25,161.8
PCTRL_ICU
  Top 0.2: R14.P$2 69.95,182.77 T5.1 67.9,181.18 67.9,178.1 66.3,176.5 50.4,176.5 50.1,176.2 50.1,165.24 R17.P$2
PCTRL_SCU
  Top 0.2: R26.P$2 69.58,161.47 T4.1 68.4,162.65 68.4,166.8 64.2,171 63.7,171 62.7,172 62.7,173.44 62.12,174.02 56.17,174.02 50.55,168.4 50.55,163.13 R16.P$2
PD1
  Top 0.2: X4.5 89.16,135.78 88.11,134.74 88.11,133.87 89.17,132.8 98.12,132.8 X2.7
PD7  (via drill 0.5)
  Top 0.2: 10K2.2 109.21,6.5 103.63,6.5 90.5,19.63 DEBUG_OUT1.8
  Top 0.7: v118.9,15.6 v118.9,29.5
  Bottom 0.2: v118.9,29.5 118.9,35.06 121.41,37.56 121.41,39.94 119.5,41.84 TEST_MODE.2 119.41,45 119.41,46.12 115.81,49.73 115.25,49.73 114.91,50.06 114.91,51.41 114.35,51.98 113,51.98 111.54,53.44 GREENBRD.PD7
  Bottom 0.7: 10K2.2 111.7,8.4 v118.9,15.6
RX1
  Top 0.2: CAM_UP.4 130.5,119.25 PX4_FLOW.8
RX2
  Top 0.2: PX4_FLOW.6 130.75,129.5 CAM_DOWN.4
RX_GPS  (via drill 0.5)
  Top 0.2: GPS_BRD.RX 101.4,43.87 | 101.4,43.87 GPS_DBG.1 | 101.4,43.87 100.33,42.8 v99.9,42.5 | v97.17,42.5 93.8,39.13 93.8,34.55 DEBUG_OUT1.6
  Bottom 0.2: v99.9,42.5 v97.17,42.5
RX_GPS1
  Top 0.2: X4.1 90.21,141.35 91.59,141.35 92.14,140.8 97.16,140.8 X2.6
SCK_2  (via drill 0.5)
  Top 0.2: U$2.SCL 42.76,29.02 44.84,31.1 51.3,31.1 52.79,32.59 52.79,37.51 v52.3,38
  Bottom 0.2: v52.3,38 53.3,39 56.46,39 U$1.PB13
SCK_3
  Top 0.2: U$3.SCL 42.8,33.71 40.84,31.76 34.6,31.76 33.8,32.56 33.8,36 33.3,36.5 28.6,36.5 28.2,36.9 28.2,44.09 U$1.PC10
SCL
  Top 0.2: X3.5 89.28,146.59 86.5,149.38 86.5,172.9 89.7,176.1 97.12,176.1 U$17.SCL
SCL3
  Top 0.2: TO_OUT_BOARD.7 50.75,7 61,7 69,15 69,42.98 U$4.SCL
  Bottom 0.2: U$4.SCL 65.5,46.4 66.55,47.45 66.55,51.92 66.34,52.13 64.66,52.13 64.62,52.1 58.9,52.1 58.5,51.7 54,51.7 47.5,45.2 42.1,45.2 40.9,44 U$3.SCX 32.81,51.7 30.75,51.7 U$1.PA8
SDA  (via drill 0.5)
  Top 0.2: v90.43,155.3 90.43,164.43 93.3,167.3 93.3,174.2 94.34,175.24 98.8,175.24 U$17.SDA
  Bottom 0.2: X3.6 93.1,147.9 93.1,152.63 v90.43,155.3
SDA3
  Top 0.2: TO_OUT_BOARD.6 48.75,7.5 60.86,7.5 68.5,15.14 68.5,40.94 U$4.SDA | 65.26,43.5 U$4.SDA | U$4.SDA 58.53,50.43 U$1.PC9 56.46,51.7 54,51.7 47.5,45.2 38.5,45.2 38.36,45.06 U$3.SDX
SOL_D_1
  Bottom 0.2: SOL_D_1_2.1 18.98,10.75 20.09,9.64 21.91,9.64 22.11,9.84 22.11,17.39 28.32,23.6 28.32,23.62 46.12,23.62 51.35,28.85 59.23,28.85 | 59.23,28.85 77.22,28.85 81.2,32.83 81.2,62.69 70.2,73.69 R9.P$2 | 59.23,28.85 59.23,23.98 U$1.PC2
SOL_D_2  (via drill 0.5)
  Top 0.2: SOL_D_1_2.3 14.57,15.75 18.15,19.33 18.15,28.35 18.65,28.85 20.6,28.85 21.45,28 v21.5,28
  Bottom 0.2: v21.5,28 24.05,30.55 24.69,30.55 25.66,31.52 45.85,31.52 47.4,33.08 47.4,34.85 52.12,34.85 52.12,31.45 56.7,31.45 | R8.P$1 67.4,72.29 70.94,72.29 80.7,62.52 80.7,32.98 79.17,31.45 56.7,31.45 | 56.7,31.45 55.5,32.65 U$1.PC3
SOL_D_3  (via drill 0.5)
  Top 0.2: v20.25,28 20.25,19.07 19.89,18.71 19.89,11.86 SOL_D_3_4.1
  Bottom 0.2: v20.25,28 23.25,31 24.5,31 27.35,33.85 32.71,33.85 34.16,35.3 52.4,35.3 53.75,33.95 60.15,33.95 | R7.P$1 63.9,71.79 70.73,71.79 80.2,62.33 80.2,35 79.15,33.95 60.15,33.95 | 60.15,33.95 58.91,35.19 U$1.PC4
SOL_D_4  (via drill 0.5)
  Top 0.2: SOL_D_3_4.3 21,14.82 22.11,13.71 22.11,9.84 21.91,9.64 20.09,9.64 19,10.73 v19,28
  Bottom 0.2: v19,28 27.5,36.5 56.6,36.5 | R6.P$2 58,73.62 60.43,71.19 70.69,71.19 79.75,62.14 79.75,37.75 78.5,36.5 56.6,36.5 | 56.6,36.5 55.37,37.73 U$1.PC5
SOL_U_1
  Bottom 0.2: R5.P$2 15.5,82.5 31,98 52.25,98 SOL_U_1_2.1 58.25,92 82,92 83.03,90.97 83.03,29.02 61.01,7 30.7,7 26.8,10.9 26.8,19.7 29.47,22.37 U$1.PB1
SOL_U_2  (via drill 0.5)
  Top 0.2: v28.2,19.3 28.2,26.31 U$1.PA7
  Bottom 0.2: R4.P$1 35.69,97.5 47.75,97.5 SOL_U_1_2.3 53.7,91.55 81.6,91.55 82.58,90.58 82.58,29.2 60.82,7.45 30.9,7.45 27.25,11.1 27.25,18.25 28.2,19.2 v28.2,19.3
SOL_U_3  (via drill 0.5)
  Top 0.2: v29.45,19.3 30.7,20.55 30.7,28.89 U$1.PC1
  Bottom 0.2: R3.P$2 33.84,91.66 33.84,95.02 35.7,96.88 41.38,96.88 SOL_U_3_4.1 47.15,91.1 81.4,91.1 82.12,90.38 82.12,29.39 60.64,7.9 31.09,7.9 27.7,11.29 27.7,17.55 v29.45,19.3
SOL_U_4  (via drill 0.5)
  Top 0.2: v30.7,19.3 32.85,21.45 33.3,21.89 33.3,30.8 32.6,31.5 30.63,31.5 U$1.PA5
  Bottom 0.2: 42.6,90.65 81.21,90.65 81.67,90.19 81.67,29.57 60.45,8.35 31.27,8.35 28.15,11.47 28.15,16.75 v30.7,19.3 | SOL_U_3_4.3 42.6,90.65 | R2.P$2 27.5,84.31 33.84,90.65 42.6,90.65
SW_CLK
  Bottom 0.2: DEBUG.2 4.3,20.14 4.3,13.6 15.4,2.5 55.8,2.5 X1.2
SW_DAT
  Bottom 0.2: DEBUG.1 3.85,22.19 3.85,13.41 15.21,2.05 57.35,2.05 X1.1
SWC
  Top 0.2: DEBUG1.2 147.6,98.2 143.3,98.2 142.9,97.8 89.61,97.8 87.28,95.48 87.28,44.47 DEBUG_OUT1.2
SWC1
  Top 0.2: DEBUG2.2 128.5,109.9 128.5,113.75 PX4_FLOW.9
SWC_ICU
  Top 0.2: X4.6 95.62,136.3 X2.1
SWCLK_0  (via drill 0.5)
  Top 0.2: v10.25,142 10.25,137.15 v10.3,137.1 | v44.9,105.15 45.71,105.15 47.61,107.05 56,107.05 DEBUG_TO_OUT.1
  Bottom 0.2: U$5.SWCLK 22.04,144.8 11.7,144.8 10.25,143.35 v10.25,142 | v10.3,137.1 9.6,136.4 7.94,136.4 4.05,132.51 4.05,106.49 6.22,104.32 44.07,104.32 v44.9,105.15
SWCLK_2
  Top 0.2: DEBUG_TO_OUT.4 64.88,106.6 66.53,104.95 80.59,104.95 83.29,107.66 83.29,114.66 81.73,116.22 DEBUG_FROM_SCU.3
SWCLK_3
  Top 0.2: DEBUG_TO_OUT.6 69.7,105.85 80.21,105.85 82.39,108.03 82.39,111.49 DEBUG_FROM_SCU.1
SWCLK_CCU
  Top 0.2: X5.2 103.68,136.28 X2.9
SWCLK_PCU
  Top 0.2: X5.6 107.68,136.28 X2.13
SWCLK_SCU
  Top 0.2: X5.4 105.68,136.28 X2.11
SWD
  Top 0.2: DEBUG1.1 91.07,97 88.28,94.21 88.28,45.97 DEBUG_OUT1.1
SWD1
  Top 0.2: DEBUG2.1 128,107.9 128,111.75 PX4_FLOW.10
SWD_ICU
  Top 0.2: X4.4 95.62,138.3 X2.2
SWDIO_0  (via drill 0.5)
  Top 0.2: v9,142 v9,138.1 | v45.1,103.9 47.8,106.6 54.3,106.6 55.5,105.4 57.75,105.4 DEBUG_TO_OUT.2
  Bottom 0.2: U$5.SWDIO 20,145.3 11.3,145.3 9,143 v9,142 | v9,138.1 3.6,132.7 3.6,106.3 6.1,103.8 45,103.8 v45.1,103.9
SWDIO_2
  Top 0.2: DEBUG_TO_OUT.3 62.38,106.6 64.48,104.5 80.77,104.5 83.74,107.47 83.74,116.71 81.73,118.72 DEBUG_FROM_SCU.4
SWDIO_3
  Top 0.2: DEBUG_TO_OUT.5 67.65,105.4 80.4,105.4 82.84,107.84 82.84,113.54 DEBUG_FROM_SCU.2
SWDIO_CCU  (via drill 0.5)
  Top 0.2: X2.10 105.14,139.82 108.26,139.82 110.1,137.98 v110.1,127 | X5.1 102.6,108.32 v102.6,118.4
  Bottom 0.2: v102.6,118.4 110.1,125.9 v110.1,127
SWDIO_PCU  (via drill 0.5)
  Top 0.2: X2.14 109.2,136.76 109.2,129.57 v108.8,129.17 | X5.5 107.17,107.24 105.67,105.74 103.06,105.74 100.1,108.7 v100.1,118.4
  Bottom 0.2: v100.1,118.4 100.1,120.47 v108.8,129.17
SWDIO_SCU  (via drill 0.5)
  Top 0.2: X2.12 106.69,139.37 108.08,139.37 109.65,137.79 109.65,128.32 v109.25,127.92 | X5.3 105.17,107.24 104.11,106.19 103.25,106.19 101.35,108.08 v101.35,118.4
  Bottom 0.2: v101.35,118.4 109.25,126.3 v109.25,127.92
TX1
  Top 0.2: CAM_UP.3 133,121.75 PX4_FLOW.7
TX2
  Top 0.2: PX4_FLOW.5 129.36,130.61 133.14,130.61 CAM_DOWN.3
TX_GPS  (via drill 0.5)
  Top 0.2: 109.1,38.8 GPS_BRD.TX 109.06,38.7 110.08,37.69 110.08,35.1 105.35,30.38 105.35,29.7 105.91,29.14 116.15,29.14 121.66,34.65 132.12,34.65 134.15,36.67 134.15,37.35 133.47,38.02 133.47,43.54 133.81,43.88 133.81,50.85 GREENBRD.PD9 | v108.5,43 107.7,43.8 103.5,43.8 103.4,43.9 GPS_DBG.2 102.1,46.6 v99.6,46.6 | v96.77,46.6 96.77,43.37 93.2,39.8 93.2,36.45 DEBUG_OUT1.5
  Bottom 0.2: GPS_BRD.TX 109.06,42.44 v108.5,43 | v99.6,46.6 v96.77,46.6
TX_GPS1
  Top 0.2: X4.7 89.67,134.3 90.72,133.25 96.57,133.25 X2.5

## Text on the board
tPlace: LSM303C | Спутникостроительный завод / 2018-2019 / OUT BOARD | 25мм | 5V | GND | Спутникостроительный завод / 2018-2019 / GPS ANTENNA | GND | 150 | 22nF | 10nF | CANL | CANH | GND | CRX | VCC | CTX | ADC | GND | SWD_ICU | DF_S_RX | RX_GPS | GND | CCU | SCU | SWD_PCU | 3V3 | Спутникостроительный завод / 2018-2019 / RF ANTENNA | GND | SWC_ICU | DF_S_TX | TX_GPS | PD7 | SWC_CCU | SWC_SCU | SWC_PCU | 5V | CRX | Rx2 | Tx2 | 5V | GND | CTX | TX2 | Перед запуском убедитесь / в исправности системы | RX2 | Rx1 | Tx1 | 5V | GND | GND | TX1 | RX1 | Clearance | DAT | SWC | KeyHolder | KEY_MIN | SWD | Соблюдайте осторожность / при монтаже | KEY_PL | 5V | CANH | SWC | CANL | Спутникостроительный завод / 2018-2019 / PCU BOARD | Спутникостроительный завод / 2018-2019 / CCU BOARD | SWD | GND | 4 | 3 | 2 | 1 | 5V | AMP | 7.4V | AMP | CANH | CANL | GND | SOL_DOWN_4 | SOL_DOWN_3 | SOL_DOWN_2 | SOL_DOWN_1 | GND | GND | CANL | SOL_UP_1 | SOL_UP_2 | SOL_UP_3 | SOL_UP_4 | CANL | CANH | CANH | 5V_CCU | 5V_CCU | 5V_SCU | 10K | LSM303C | 5V | 3V3 | CAN | GND | IRIDIUM / TX | 3V3 | TX | RX | GND | PD7 | IRIDIUM / RX | GND | GPS | ANT | 5V | RX | TX | GND | 2 | 4 | 1 | 3 | Спутникостроительный завод / 2018-2019 / SCU BOARD | SW_CLK | SW_DAT | Спутникостроительный завод / 2018-2019 | ICU board
bPlace: GND | DQ | 3V3 | GND | 5V | ADC_1 | 3V3 | GND | GND | ADC_2 | KEY_MIN | GND | KEY_PL | MAG_CS | DQ | ADC_1 | ADC_2 | SCL | SDA | 5V | GND | DF_S_RX | RX_GPS | SWD_ICU | GND | SWC_ICU | PD7 | DF_S_TX | TX_GPS | SWC_CCU | SWC_SCU | SWC_PCU | SWD_PCU | SWC_CCU | SWD_SCU | CANL | CANH | CRX | CTX | GND | 3V3 | LSM6DS3 | GND | 5V | 5V | GND | BME280